# EAGLE board ControlModule-pan (EAGLE 7.2.0), part 1 of 2
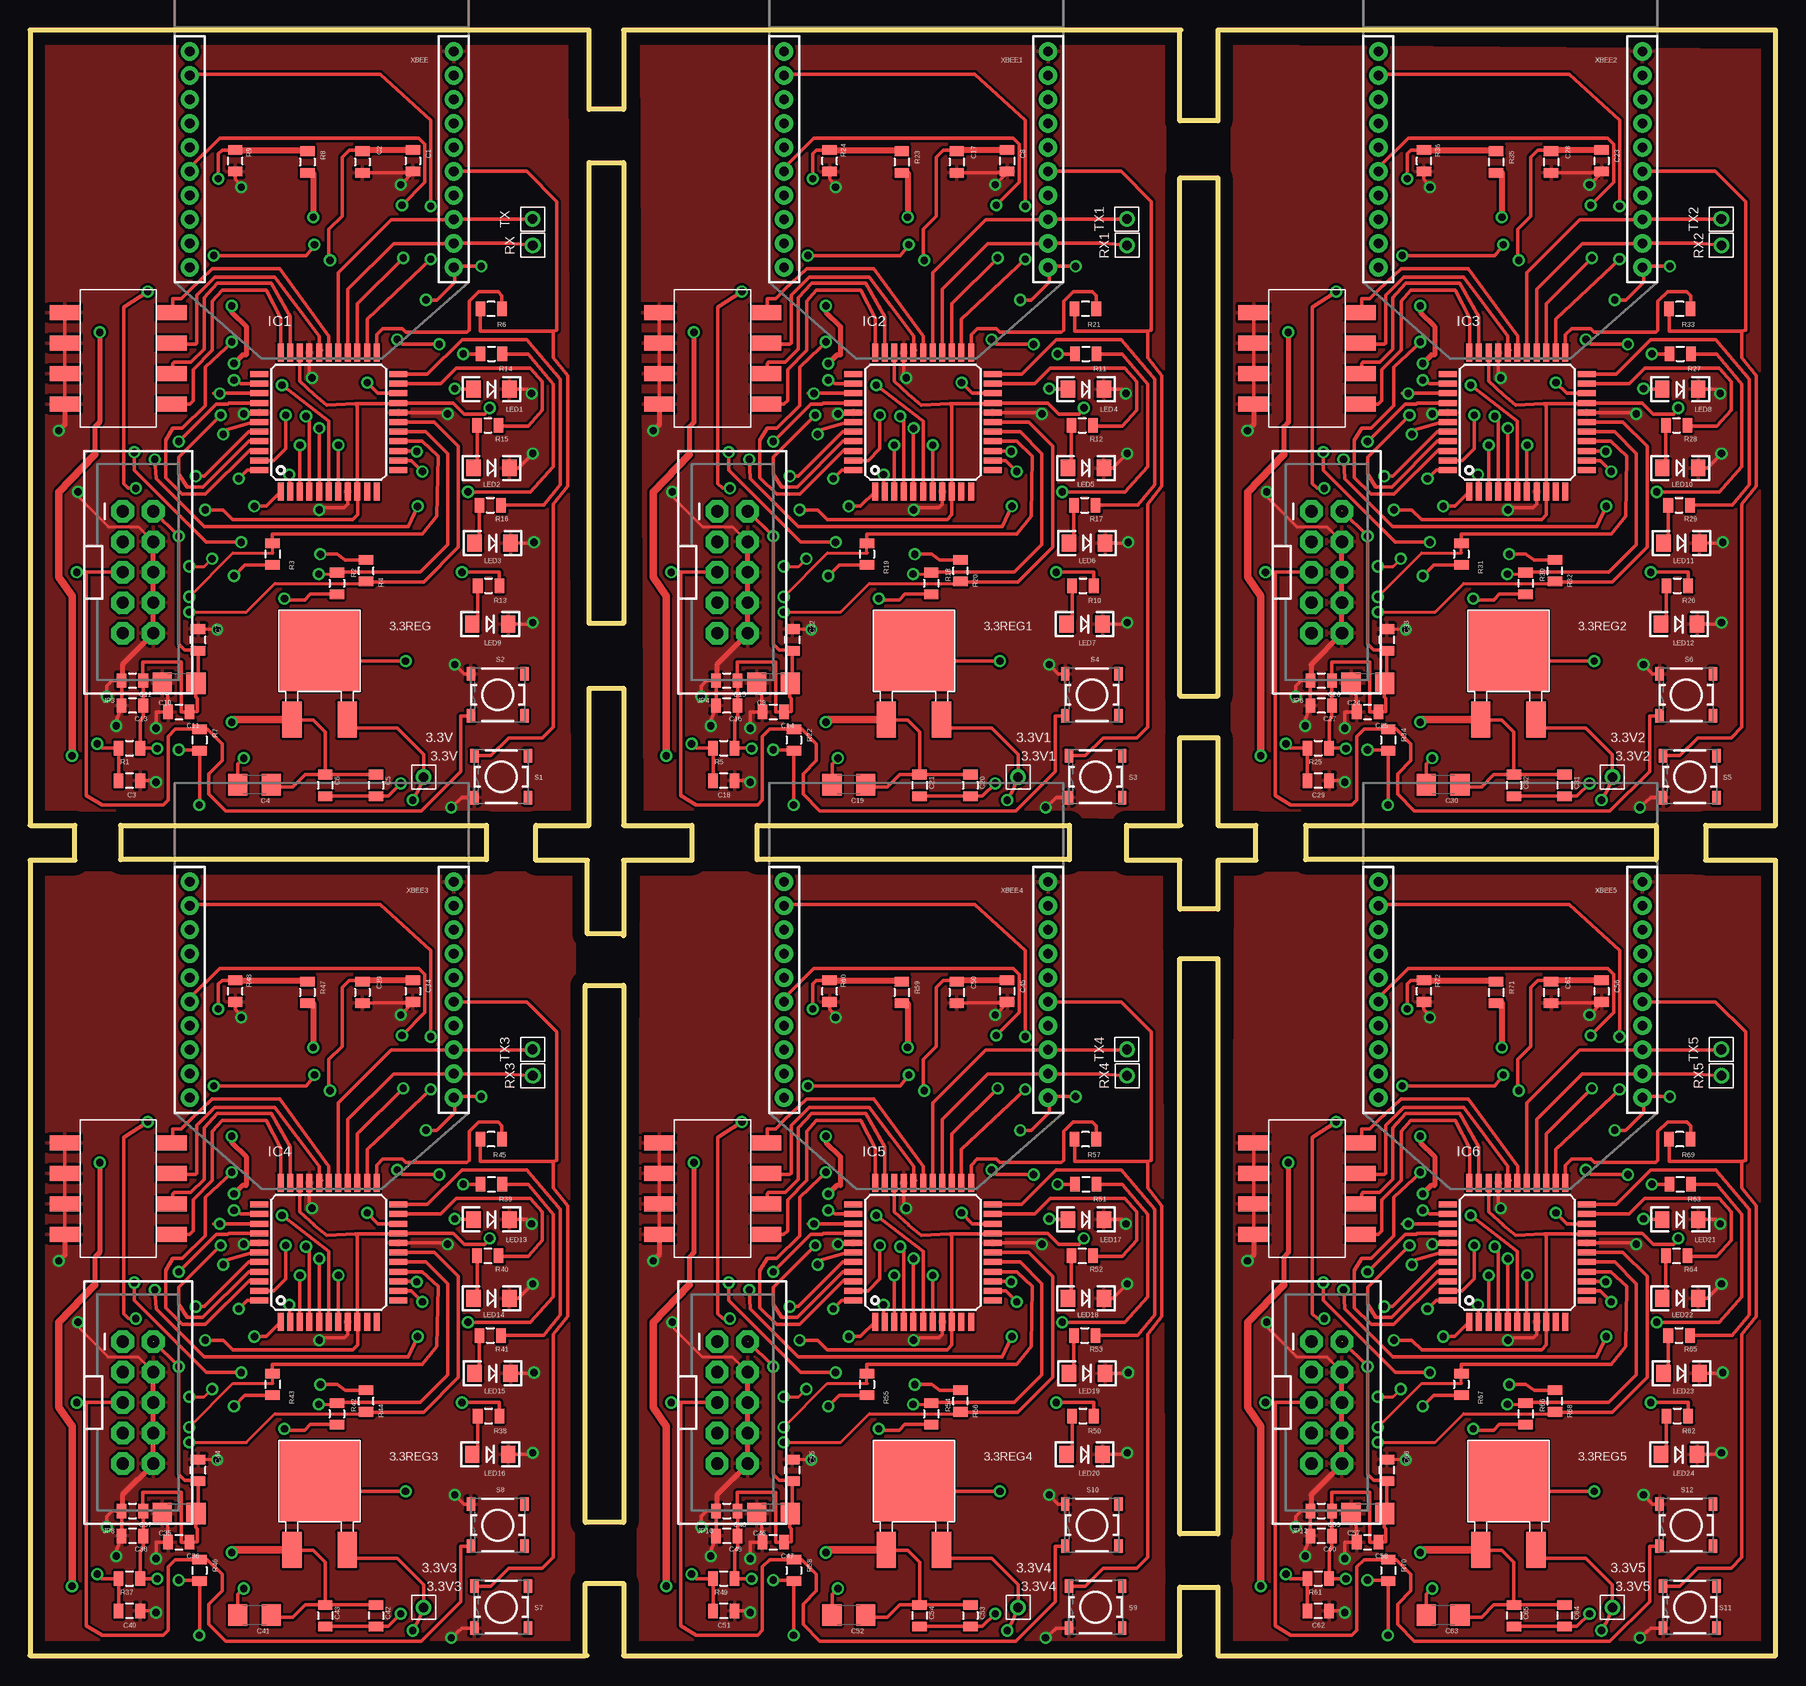
[diagram p0: board, top side]
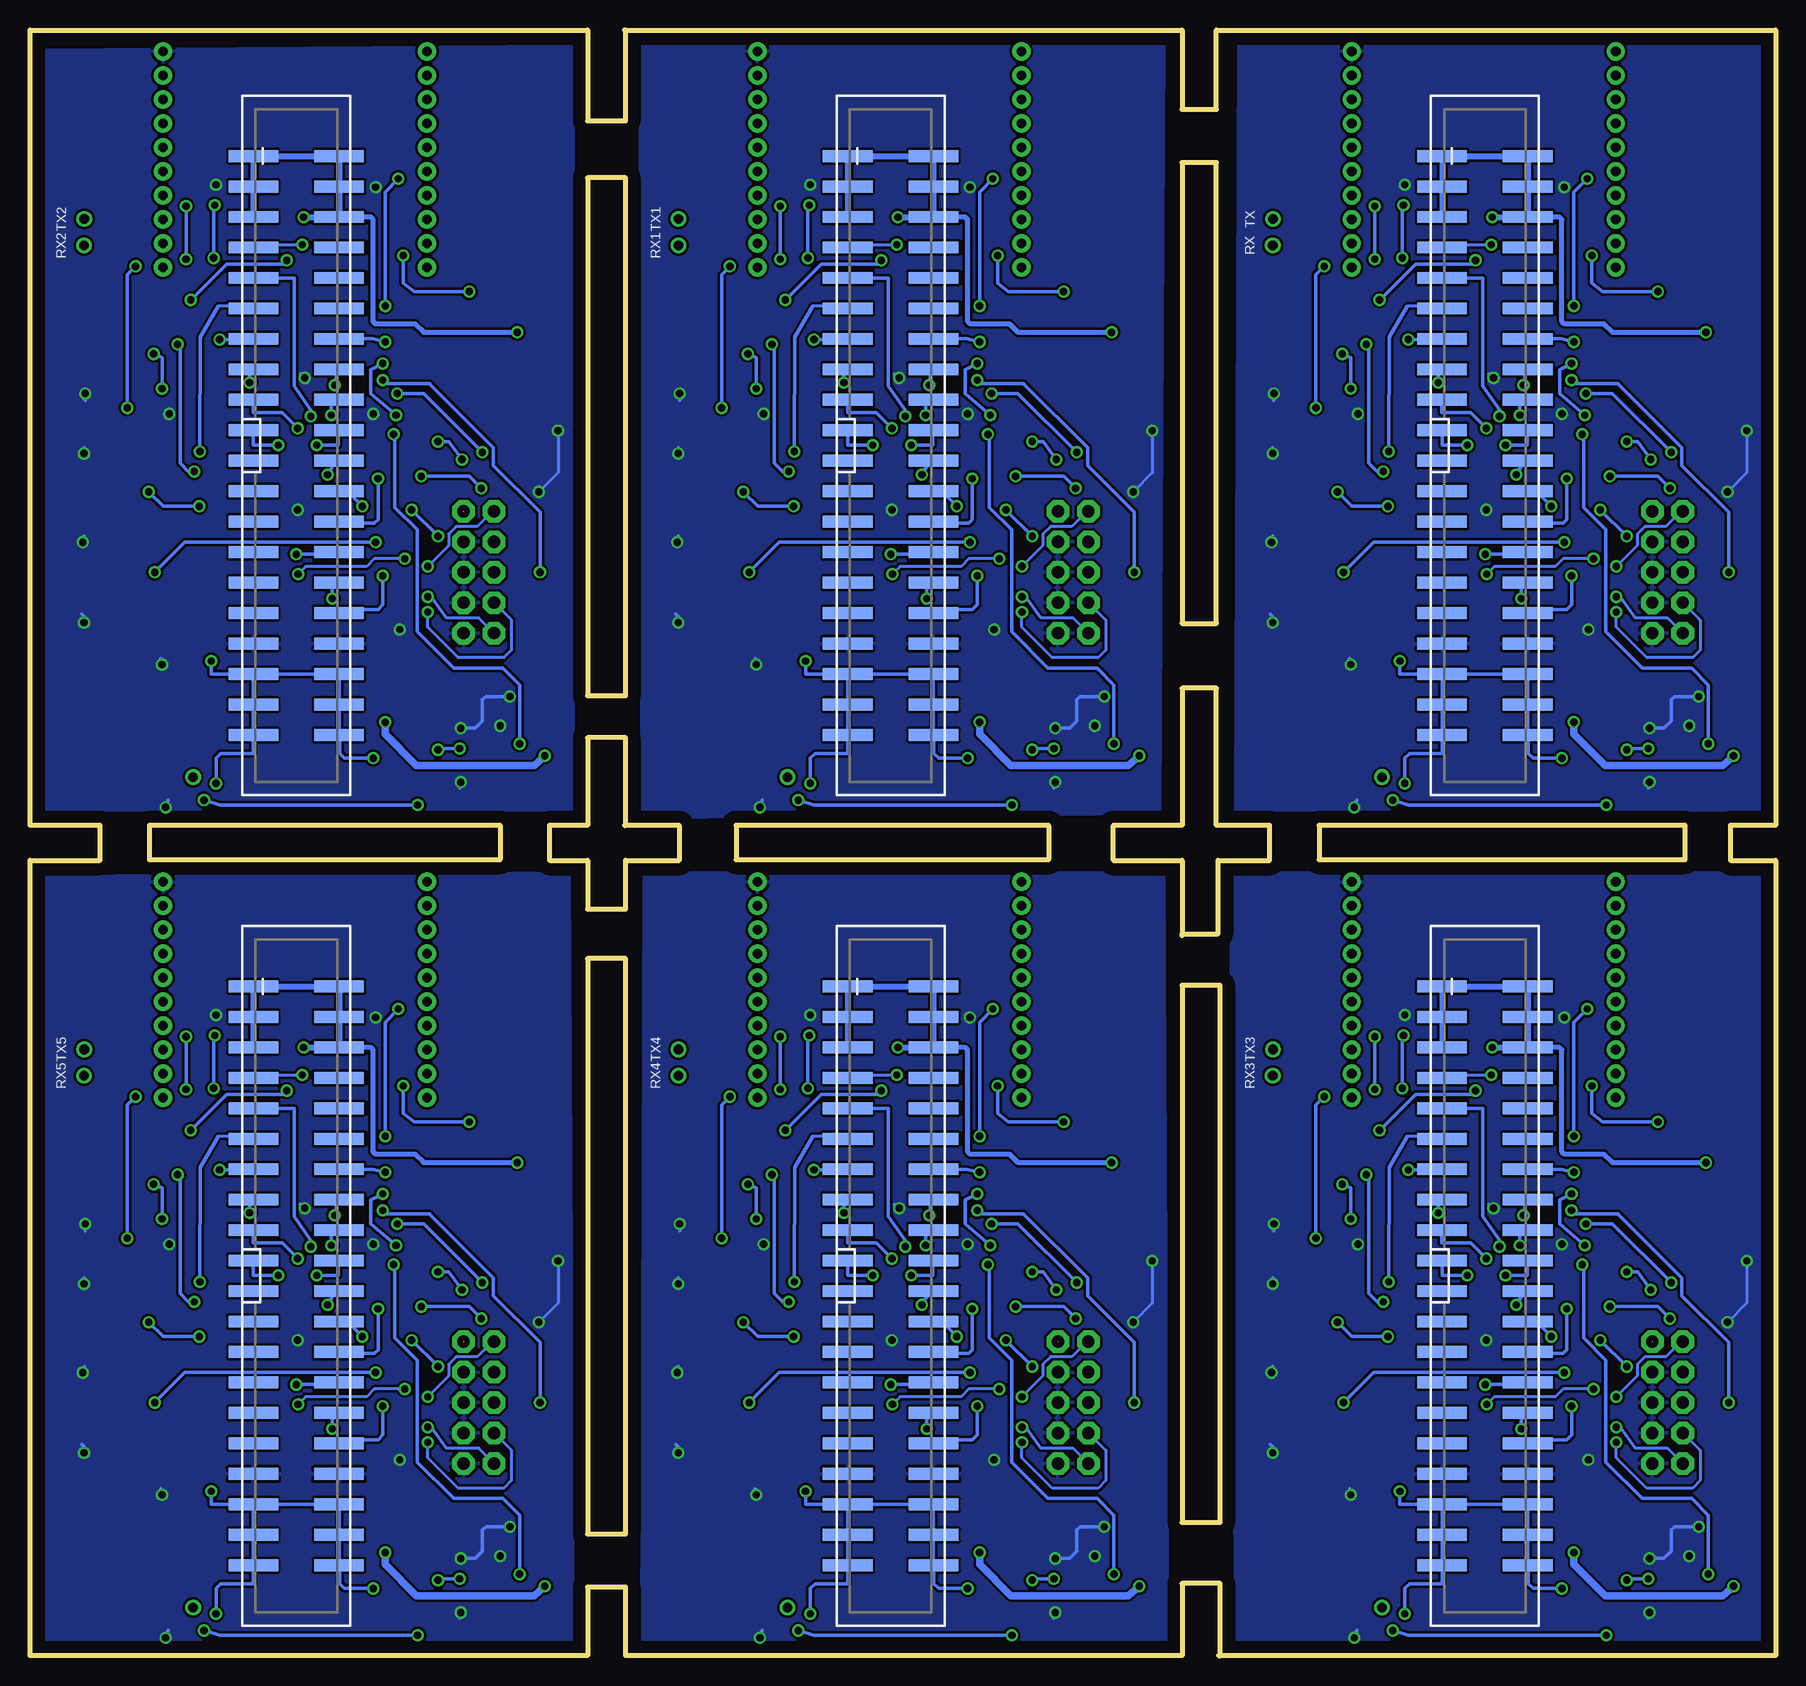
[diagram p1: board, bottom side, seen from below]

Size 145.46 x 135.51 mm. Coordinates in mm from the lower left corner, seen from the top.
Outline: 95.81,69.22 91.37,69.22 91.37,66.3 95.81,66.3 95.81,62.23 98.99,62.23 98.99,66.3 102.16,66.3 102.16,69.22 98.99,69.22 98.99,76.52 95.81,76.52 95.81,69.22
Outline: 95.93,69.22 95.81,69.22
Outline: 95.81,135.51 95.81,127.95 98.99,127.95 98.99,135.51 145.46,135.51 145.46,69.22 139.63,69.22 139.63,66.3 145.46,66.3 145.46,0 98.99,0 98.99,5.72 95.81,5.72 95.81,0 49.46,0 49.46,6.03 46.28,6.03 46.28,0
Outline: 95.81,135.51 95.93,135.51
Outline: 95.81,135.51 49.46,135.51 49.46,128.91 46.6,128.91 46.6,135.51 0,135.51 0,69.22 3.74,69.22 3.74,66.3 0,66.3 0,0 46.28,0
Outline: 46.4,0 46.28,0
Outline: 49.46,60.17 46.44,60.17 46.44,66.3 42.16,66.3 42.16,69.22 46.6,69.22 46.6,80.65 49.46,80.65 49.46,69.22 55.17,69.22 55.17,66.3 49.46,66.3 49.46,60.01
Outline: 7.55,69.22 38.03,69.22 38.03,66.36 7.55,66.36 7.55,69.22
Outline: 46.6,86.04 46.6,124.46 49.46,124.46 49.46,86.04 46.6,86.04
Outline: 60.57,69.22 86.61,69.22 86.61,66.36 60.57,66.36 60.57,69.22
Outline: 95.81,80.01 95.81,123.19 98.99,123.19 98.99,80.01 95.81,80.01
Outline: 106.29,69.22 135.5,69.22 135.5,66.36 106.29,66.36 106.29,69.22
Outline: 46.28,11.11 46.28,55.88 49.46,55.88 49.46,11.11 46.28,11.11
Outline: 95.81,10.16 95.81,58.1 98.99,58.1 98.99,10.16 95.81,10.16
Copper layers (1*16): Top 0.035mm / dielectric 1.5mm / Bottom 0.035mm
Design rules "default": minimum track width 10mil, minimum drill 24mil, track to track 8mil, track to pad 8mil, pad to pad 8mil, via to via 8mil, smd to smd 8mil, copper to edge 40mil, drill to drill 8mil, minimum pad ring 10mil, minimum via ring 8mil, stop-mask expansion 4mil, vias tented up to drill 0mil, thermal gap 10mil

## Footprints (pad centres in the part's own frame; a part is rotated, then mirrored left to right if it is on the bottom)
DPAK = smd 6.7 x 6.7: DRAIN 0,0 | smd 3 x 1.6: GATE 5.75,-2.3; SOURCE 5.75,2.3
TESTING_PT = drill 0.8: P$1 0,0
0805 = smd 0.8 x 1.2: 1 -0.9,0; 2 0.9,0
1206 = smd 1.6 x 1.8: 1 -1.4,0; 2 1.4,0
TQFP44 = smd 1.5 x 0.5: 1 -5.8,4; 2 -5.8,3.2; 3 -5.8,2.4; 4 -5.8,1.6; 5 -5.8,0.8; 6 -5.8,0; 7 -5.8,-0.8; 8 -5.8,-1.6; 9 -5.8,-2.4; 10 -5.8,-3.2; 11 -5.8,-4; 23 5.8,-4; 24 5.8,-3.2; 25 5.8,-2.4; 26 5.8,-1.6; 27 5.8,-0.8; 28 5.8,0; 29 5.8,0.8; 30 5.8,1.6; 31 5.8,2.4; 32 5.8,3.2; 33 5.8,4 | smd 0.5 x 1.5: 12 -4,-5.8; 13 -3.2,-5.8; 14 -2.4,-5.8; 15 -1.6,-5.8; 16 -0.8,-5.8; 17 0,-5.8; 18 0.8,-5.8; 19 1.6,-5.8; 20 2.4,-5.8; 21 3.2,-5.8; 22 4,-5.8; 34 4,5.8; 35 3.2,5.8; 36 2.4,5.8; 37 1.6,5.8; 38 0.8,5.8; 39 0,5.8; 40 -0.8,5.8; 41 -1.6,5.8; 42 -2.4,5.8; 43 -3.2,5.8; 44 -4,5.8
2X20_SHROUDED_SMT = smd 4.14 x 0.991: 1 -3.569,24.13; 2 3.569,24.13; 3 -3.569,21.59; 4 3.569,21.59; 5 -3.569,19.05; 6 3.569,19.05; 7 -3.569,16.51; 8 3.569,16.51; 9 -3.569,13.97; 10 3.569,13.97; 11 -3.569,11.43; 12 3.569,11.43; 13 -3.569,8.89; 14 3.569,8.89; 15 -3.569,6.35; 16 3.569,6.35; 17 -3.569,3.81; 18 3.569,3.81; 19 -3.569,1.27; 20 3.569,1.27; 21 -3.569,-1.27; 22 3.569,-1.27; 23 -3.569,-3.81; 24 3.569,-3.81; 25 -3.569,-6.35; 26 3.569,-6.35; 27 -3.569,-8.89; 28 3.569,-8.89; 29 -3.569,-11.43; 30 3.569,-11.43; 31 -3.569,-13.97; 32 3.569,-13.97; 33 -3.569,-16.51; 34 3.569,-16.51; 35 -3.569,-19.05; 36 3.569,-19.05; 37 -3.569,-21.59; 38 3.569,-21.59; 39 -3.569,-24.13; 40 3.569,-24.13
2X5-SHROUDED = drill 1.016 pad 1.88 octagon: 1 -1.27,5.08; 2 1.27,5.08; 3 -1.27,2.54; 4 1.27,2.54; 5 -1.27,0; 6 1.27,0; 7 -1.27,-2.54; 8 1.27,-2.54; 9 -1.27,-5.08; 10 1.27,-5.08
LED-1206 = smd 1.2 x 1.4: A -1.5,0; C 1.5,0
TACTILE_SWITCH_SMD-2 = smd 0.7 x 1.1: 1 2.225,1.75; 2 2.225,-1.75; 3 -2.225,-1.75; 4 -2.225,1.75
4-POS-DIP-SMD = smd 1.27 x 2.54: 1 -3.81,4.445; 2 -1.27,4.445; 3 1.27,4.445; 4 3.81,4.445; 5 3.81,-4.445; 6 1.27,-4.445; 7 -1.27,-4.445; 8 -3.81,-4.445
XBEE-1 = drill 0.8 pad 1.524: 1 -11,20; 2 -11,18; 3 -11,16; 4 -11,14; 5 -11,12; 6 -11,10; 7 -11,8; 8 -11,6; 9 -11,4; 10 -11,2; 11 11,2; 12 11,4; 13 11,6; 14 11,8; 15 11,10; 16 11,12; 17 11,14; 18 11,16; 19 11,18; 20 11,20

## Placement (x,y rotation side)
3.3REG  3.3REG1AREG  [DPAK]  24.13,83.78 270 top
3.3REG1  3.3REG1AREG  [DPAK]  73.66,83.78 270 top
3.3REG2  3.3REG1AREG  [DPAK]  123.19,83.78 270 top
3.3REG3  3.3REG1AREG  [DPAK]  24.13,14.57 270 top
3.3REG4  3.3REG1AREG  [DPAK]  73.66,14.57 270 top
3.3REG5  3.3REG1AREG  [DPAK]  123.19,14.57 270 top
3.3V  TEST_PT  [TESTING_PT]  32.8,73.24 0 top
3.3V1  TEST_PT  [TESTING_PT]  82.33,73.24 0 top
3.3V2  TEST_PT  [TESTING_PT]  131.86,73.24 0 top
3.3V3  TEST_PT  [TESTING_PT]  32.8,4.02 0 top
3.3V4  TEST_PT  [TESTING_PT]  82.33,4.02 0 top
3.3V5  TEST_PT  [TESTING_PT]  131.86,4.02 0 top
C1  1uF  [0805]  31.9,124.61 270 top
C2  0.01uF  [0805]  27.7,124.51 270 top
C3  0.1uF  [0805]  8.29,72.95 180 top
C4  47uF  [1206]  18.7,72.6 180 top
C5  1uF  [0805]  28.83,72.55 270 top
C6  .01uF  [0805]  24.61,72.55 270 top
C7  .01uF  [0805]  14.01,84.68 90 top
C8  1uF  [0805]  81.43,124.61 270 top
C9  47uF  [1206]  61.96,81.06 180 top
C10  47uF  [1206]  12.43,81.06 180 top
C11  .01uF  [0805]  12.41,78.68 0 top
C12  1uF  [0805]  8.54,81.28 0 top
C13  1uF  [0805]  8.54,79.2 180 top
C14  .01uF  [0805]  61.94,78.68 0 top
C15  1uF  [0805]  58.07,81.28 0 top
C16  1uF  [0805]  58.07,79.2 180 top
C17  0.01uF  [0805]  77.23,124.51 270 top
C18  0.1uF  [0805]  57.82,72.95 180 top
C19  47uF  [1206]  68.23,72.6 180 top
C20  1uF  [0805]  78.36,72.55 270 top
C21  .01uF  [0805]  74.14,72.55 270 top
C22  .01uF  [0805]  63.54,84.68 90 top
C23  1uF  [0805]  130.96,124.61 270 top
C24  47uF  [1206]  111.49,81.06 180 top
C25  .01uF  [0805]  111.47,78.68 0 top
C26  1uF  [0805]  107.6,81.28 0 top
C27  1uF  [0805]  107.6,79.2 180 top
C28  0.01uF  [0805]  126.76,124.51 270 top
C29  0.1uF  [0805]  107.35,72.95 180 top
C30  47uF  [1206]  117.76,72.6 180 top
C31  1uF  [0805]  127.89,72.55 270 top
C32  .01uF  [0805]  123.67,72.55 270 top
C33  .01uF  [0805]  113.07,84.68 90 top
C34  1uF  [0805]  31.9,55.39 270 top
C35  47uF  [1206]  12.43,11.85 180 top
C36  .01uF  [0805]  12.41,9.46 0 top
C37  1uF  [0805]  8.54,12.07 0 top
C38  1uF  [0805]  8.54,9.98 180 top
C39  0.01uF  [0805]  27.7,55.29 270 top
C40  0.1uF  [0805]  8.29,3.73 180 top
C41  47uF  [1206]  18.7,3.38 180 top
C42  1uF  [0805]  28.83,3.34 270 top
C43  .01uF  [0805]  24.61,3.34 270 top
C44  .01uF  [0805]  14.01,15.46 90 top
C45  1uF  [0805]  81.43,55.39 270 top
C46  47uF  [1206]  61.96,11.85 180 top
C47  .01uF  [0805]  61.94,9.46 0 top
C48  1uF  [0805]  58.07,12.07 0 top
C49  1uF  [0805]  58.07,9.98 180 top
C50  0.01uF  [0805]  77.23,55.29 270 top
C51  0.1uF  [0805]  57.82,3.73 180 top
C52  47uF  [1206]  68.23,3.38 180 top
C53  1uF  [0805]  78.36,3.34 270 top
C54  .01uF  [0805]  74.14,3.34 270 top
C55  .01uF  [0805]  63.54,15.46 90 top
C56  1uF  [0805]  130.96,55.39 270 top
C57  47uF  [1206]  111.49,11.85 180 top
C58  .01uF  [0805]  111.47,9.46 0 top
C59  1uF  [0805]  107.6,12.07 0 top
C60  1uF  [0805]  107.6,9.98 180 top
C61  0.01uF  [0805]  126.76,55.29 270 top
C62  0.1uF  [0805]  107.35,3.73 180 top
C63  47uF  [1206]  117.76,3.38 180 top
C64  1uF  [0805]  127.89,3.34 270 top
C65  .01uF  [0805]  123.67,3.34 270 top
C66  .01uF  [0805]  113.07,15.46 90 top
FRAME1  FRAME-LETTER  [CREATIVE_COMMONS]  -102.94,150.5 0 top  (outside the outline)
IC1  XMEGA16A4A  [TQFP44]  24.89,102.83 90 top
IC2  XMEGA16A4A  [TQFP44]  74.42,102.83 90 top
IC3  XMEGA16A4A  [TQFP44]  123.95,102.83 90 top
IC4  XMEGA16A4A  [TQFP44]  24.89,33.61 90 top
IC5  XMEGA16A4A  [TQFP44]  74.42,33.61 90 top
IC6  XMEGA16A4A  [TQFP44]  123.95,33.61 90 top
JP1  M20X2SHROUDED_SMT  [2X20_SHROUDED_SMT]  24.21,100.88 0 bottom
JP2  M20X2SHROUDED_SMT  [2X20_SHROUDED_SMT]  73.74,100.88 0 bottom
JP3  [2X5-SHROUDED]  9,90.31 0 top
JP4  [2X5-SHROUDED]  58.53,90.31 0 top
JP5  M20X2SHROUDED_SMT  [2X20_SHROUDED_SMT]  123.27,100.88 0 bottom
JP6  [2X5-SHROUDED]  108.06,90.31 0 top
JP7  M20X2SHROUDED_SMT  [2X20_SHROUDED_SMT]  24.21,31.66 0 bottom
JP8  [2X5-SHROUDED]  9,21.1 0 top
JP9  M20X2SHROUDED_SMT  [2X20_SHROUDED_SMT]  73.74,31.66 0 bottom
JP10  [2X5-SHROUDED]  58.53,21.1 0 top
JP11  M20X2SHROUDED_SMT  [2X20_SHROUDED_SMT]  123.27,31.66 0 bottom
JP12  [2X5-SHROUDED]  108.06,21.1 0 top
LED1  [LED-1206]  38.46,105.56 0 top
LED2  [LED-1206]  38.46,99.01 0 top
LED3  [LED-1206]  38.56,92.75 0 top
LED4  [LED-1206]  87.99,105.56 0 top
LED5  [LED-1206]  87.99,99.01 0 top
LED6  [LED-1206]  88.09,92.75 0 top
LED7  [LED-1206]  87.89,85.99 0 top
LED8  [LED-1206]  137.52,105.56 0 top
LED9  [LED-1206]  38.36,85.99 0 top
LED10  [LED-1206]  137.52,99.01 0 top
LED11  [LED-1206]  137.62,92.75 0 top
LED12  [LED-1206]  137.42,85.99 0 top
LED13  [LED-1206]  38.46,36.35 0 top
LED14  [LED-1206]  38.46,29.79 0 top
LED15  [LED-1206]  38.56,23.53 0 top
LED16  [LED-1206]  38.36,16.78 0 top
LED17  [LED-1206]  87.99,36.35 0 top
LED18  [LED-1206]  87.99,29.79 0 top
LED19  [LED-1206]  88.09,23.53 0 top
LED20  [LED-1206]  87.89,16.78 0 top
LED21  [LED-1206]  137.52,36.35 0 top
LED22  [LED-1206]  137.52,29.79 0 top
LED23  [LED-1206]  137.62,23.53 0 top
LED24  [LED-1206]  137.42,16.78 0 top
R1  10k  [0805]  8.29,75.65 0 top
R2  4.7k  [0805]  25.57,89.38 270 top
R3  4.7k  [0805]  20.22,91.83 270 top
R4  4.7k  [0805]  28.01,90.44 90 top
R5  10k  [0805]  57.82,75.65 0 top
R6  4.7k  [0805]  38.43,112.26 180 top
R7  10k  [0805]  14.13,76.33 270 top
R8  80k  [0805]  23.11,124.51 270 top
R9  20k  [0805]  17.11,124.61 90 top
R10  1k  [0805]  87.74,89.2 0 top
R11  1k  [0805]  87.99,108.52 0 top
R12  1k  [0805]  87.69,102.56 0 top
R13  1k  [0805]  38.21,89.2 0 top
R14  1k  [0805]  38.46,108.52 0 top
R15  1k  [0805]  38.16,102.56 0 top
R16  1k  [0805]  38.36,95.9 0 top
R17  1k  [0805]  87.89,95.9 0 top
R18  4.7k  [0805]  75.1,89.38 270 top
R19  4.7k  [0805]  69.75,91.83 270 top
R20  4.7k  [0805]  77.54,90.44 90 top
R21  4.7k  [0805]  87.96,112.26 180 top
R22  10k  [0805]  63.66,76.33 270 top
R23  80k  [0805]  72.64,124.51 270 top
R24  20k  [0805]  66.64,124.61 90 top
R25  10k  [0805]  107.35,75.65 0 top
R26  1k  [0805]  137.27,89.2 0 top
R27  1k  [0805]  137.52,108.52 0 top
R28  1k  [0805]  137.22,102.56 0 top
R29  1k  [0805]  137.42,95.9 0 top
R30  4.7k  [0805]  124.63,89.38 270 top
R31  4.7k  [0805]  119.28,91.83 270 top
R32  4.7k  [0805]  127.07,90.44 90 top
R33  4.7k  [0805]  137.49,112.26 180 top
R34  10k  [0805]  113.19,76.33 270 top
R35  80k  [0805]  122.17,124.51 270 top
R36  20k  [0805]  116.17,124.61 90 top
R37  10k  [0805]  8.29,6.43 0 top
R38  1k  [0805]  38.21,19.98 0 top
R39  1k  [0805]  38.46,39.3 0 top
R40  1k  [0805]  38.16,33.34 0 top
R41  1k  [0805]  38.36,26.69 0 top
R42  4.7k  [0805]  25.57,20.17 270 top
R43  4.7k  [0805]  20.22,22.61 270 top
R44  4.7k  [0805]  28.01,21.23 90 top
R45  4.7k  [0805]  38.43,43.05 180 top
R46  10k  [0805]  14.13,7.11 270 top
R47  80k  [0805]  23.11,55.29 270 top
R48  20k  [0805]  17.11,55.39 90 top
R49  10k  [0805]  57.82,6.43 0 top
R50  1k  [0805]  87.74,19.98 0 top
R51  1k  [0805]  87.99,39.3 0 top
R52  1k  [0805]  87.69,33.34 0 top
R53  1k  [0805]  87.89,26.69 0 top
R54  4.7k  [0805]  75.1,20.17 270 top
R55  4.7k  [0805]  69.75,22.61 270 top
R56  4.7k  [0805]  77.54,21.23 90 top
R57  4.7k  [0805]  87.96,43.05 180 top
R58  10k  [0805]  63.66,7.11 270 top
R59  80k  [0805]  72.64,55.29 270 top
R60  20k  [0805]  66.64,55.39 90 top
R61  10k  [0805]  107.35,6.43 0 top
R62  1k  [0805]  137.27,19.98 0 top
R63  1k  [0805]  137.52,39.3 0 top
R64  1k  [0805]  137.22,33.34 0 top
R65  1k  [0805]  137.42,26.69 0 top
R66  4.7k  [0805]  124.63,20.17 270 top
R67  4.7k  [0805]  119.28,22.61 270 top
R68  4.7k  [0805]  127.07,21.23 90 top
R69  4.7k  [0805]  137.49,43.05 180 top
R70  10k  [0805]  113.19,7.11 270 top
R71  80k  [0805]  122.17,55.29 270 top
R72  20k  [0805]  116.17,55.39 90 top
RX  TEST_PT  [TESTING_PT]  41.9,117.56 90 top
RX1  TEST_PT  [TESTING_PT]  91.43,117.56 90 top
RX2  TEST_PT  [TESTING_PT]  140.96,117.56 90 top
RX3  TEST_PT  [TESTING_PT]  41.9,48.34 90 top
RX4  TEST_PT  [TESTING_PT]  91.43,48.34 90 top
RX5  TEST_PT  [TESTING_PT]  140.96,48.34 90 top
S1  SWITCH-MOMENTARY-2SMD-2  [TACTILE_SWITCH_SMD-2]  39.26,73.27 180 top
S2  SWITCH-MOMENTARY-2SMD-2  [TACTILE_SWITCH_SMD-2]  38.97,80.1 180 top
S3  SWITCH-MOMENTARY-2SMD-2  [TACTILE_SWITCH_SMD-2]  88.79,73.27 180 top
S4  SWITCH-MOMENTARY-2SMD-2  [TACTILE_SWITCH_SMD-2]  88.5,80.1 180 top
S5  SWITCH-MOMENTARY-2SMD-2  [TACTILE_SWITCH_SMD-2]  138.32,73.27 180 top
S6  SWITCH-MOMENTARY-2SMD-2  [TACTILE_SWITCH_SMD-2]  138.03,80.1 180 top
S7  SWITCH-MOMENTARY-2SMD-2  [TACTILE_SWITCH_SMD-2]  39.26,4.05 180 top
S8  SWITCH-MOMENTARY-2SMD-2  [TACTILE_SWITCH_SMD-2]  38.97,10.88 180 top
S9  SWITCH-MOMENTARY-2SMD-2  [TACTILE_SWITCH_SMD-2]  88.79,4.05 180 top
S10  SWITCH-MOMENTARY-2SMD-2  [TACTILE_SWITCH_SMD-2]  88.5,10.88 180 top
S11  SWITCH-MOMENTARY-2SMD-2  [TACTILE_SWITCH_SMD-2]  138.32,4.05 180 top
S12  SWITCH-MOMENTARY-2SMD-2  [TACTILE_SWITCH_SMD-2]  138.03,10.88 180 top
TX  TEST_PT  [TESTING_PT]  41.88,119.75 90 top
TX1  TEST_PT  [TESTING_PT]  91.41,119.75 90 top
TX2  TEST_PT  [TESTING_PT]  140.94,119.75 90 top
TX3  TEST_PT  [TESTING_PT]  41.88,50.54 90 top
TX4  TEST_PT  [TESTING_PT]  91.41,50.54 90 top
TX5  TEST_PT  [TESTING_PT]  140.94,50.54 90 top
U$1  4-POS-DIP  [4-POS-DIP-SMD]  7.35,108.15 270 top
U$2  4-POS-DIP  [4-POS-DIP-SMD]  56.88,108.15 270 top
U$3  4-POS-DIP  [4-POS-DIP-SMD]  106.41,108.15 270 top
U$4  4-POS-DIP  [4-POS-DIP-SMD]  7.35,38.93 270 top
U$5  4-POS-DIP  [4-POS-DIP-SMD]  56.88,38.93 270 top
U$6  4-POS-DIP  [4-POS-DIP-SMD]  106.41,38.93 270 top
XBEE  XBEE-1B1  [XBEE-1]  24.31,135.73 180 top
XBEE1  XBEE-1B1  [XBEE-1]  73.84,135.73 180 top
XBEE2  XBEE-1B1  [XBEE-1]  123.37,135.73 180 top
XBEE3  XBEE-1B1  [XBEE-1]  24.31,66.51 180 top
XBEE4  XBEE-1B1  [XBEE-1]  73.84,66.51 180 top
XBEE5  XBEE-1B1  [XBEE-1]  123.37,66.51 180 top

## Library data of the parts
3.3REG 3.3REG1-3.3REG5 3.3V 3.3V1-3.3V5 RX RX1-RX5 TX TX1-TX5 = gen3
C1-C66 = SparkFun-Capacitors
FRAME1 = SparkFun-Aesthetics
IC1-IC6 = atmel; OC_FARNELL: unknown; OC_NEWARK: unknown
JP1-JP12 = SparkFun-Connectors
LED1-LED24 = SparkFun-LED
R1 R5-R17 R21-R29 R33-R41 R45-R53 R57-R65 R69-R72 = SparkFun-Passives
R2-R4 R18-R20 R30-R32 R42-R44 R54-R56 R66-R68 = SparkFun-Resistors
S1-S12 = SparkFun-Electromechanical
U$1-U$6 = SparkFun-Electromechanical; PROD_ID: SWCH-12418
XBEE XBEE1-XBEE5 = SparkFun-RF

## Nets
3.3V: 3.3REG.SOURCE 3.3V.P$1 C1.1 C2.1 C7.1 C10.1 C11.2 C12.2 C13.1 IC1.9 IC1.19 IC1.31 JP3.2 R1.2 R7.2 XBEE.1
3.3V1: 3.3REG1.SOURCE 3.3V1.P$1 C8.1 C9.1 C14.2 C15.2 C16.1 C17.1 C22.1 IC2.9 IC2.19 IC2.31 JP4.2 R5.2 R22.2 XBEE1.1
3.3V2: 3.3REG2.SOURCE 3.3V2.P$1 C23.1 C24.1 C25.2 C26.2 C27.1 C28.1 C33.1 IC3.9 IC3.19 IC3.31 JP6.2 R25.2 R34.2 XBEE2.1
3.3V3: 3.3REG3.SOURCE 3.3V3.P$1 C34.1 C35.1 C36.2 C37.2 C38.1 C39.1 C44.1 IC4.9 IC4.19 IC4.31 JP8.2 R37.2 R46.2 XBEE3.1
3.3V4: 3.3REG4.SOURCE 3.3V4.P$1 C45.1 C46.1 C47.2 C48.2 C49.1 C50.1 C55.1 IC5.9 IC5.19 IC5.31 JP10.2 R49.2 R58.2 XBEE4.1
3.3V5: 3.3REG5.SOURCE 3.3V5.P$1 C56.1 C57.1 C58.2 C59.2 C60.1 C61.1 C66.1 IC6.9 IC6.19 IC6.31 JP12.2 R61.2 R70.2 XBEE5.1
12V: 3.3REG.GATE C4.1 C5.1 C6.1 JP1.1 JP1.2 JP1.3 JP1.4 JP1.5 JP1.6 R8.2
12V1: 3.3REG1.GATE C19.1 C20.1 C21.1 JP2.1 JP2.2 JP2.3 JP2.4 JP2.5 JP2.6 R23.2
12V2: 3.3REG2.GATE C30.1 C31.1 C32.1 JP5.1 JP5.2 JP5.3 JP5.4 JP5.5 JP5.6 R35.2
12V3: 3.3REG3.GATE C41.1 C42.1 C43.1 JP7.1 JP7.2 JP7.3 JP7.4 JP7.5 JP7.6 R47.2
12V4: 3.3REG4.GATE C52.1 C53.1 C54.1 JP9.1 JP9.2 JP9.3 JP9.4 JP9.5 JP9.6 R59.2
12V5: 3.3REG5.GATE C63.1 C64.1 C65.1 JP11.1 JP11.2 JP11.3 JP11.4 JP11.5 JP11.6 R71.2
12VGND: 3.3REG.DRAIN C4.2 C5.2 C6.2 JP1.35 JP1.36 JP1.37 JP1.38 JP1.39 JP1.40
12VGND1: 3.3REG1.DRAIN C19.2 C20.2 C21.2 JP2.35 JP2.36 JP2.37 JP2.38 JP2.39 JP2.40
12VGND2: 3.3REG2.DRAIN C30.2 C31.2 C32.2 JP5.35 JP5.36 JP5.37 JP5.38 JP5.39 JP5.40
12VGND3: 3.3REG3.DRAIN C41.2 C42.2 C43.2 JP7.35 JP7.36 JP7.37 JP7.38 JP7.39 JP7.40
12VGND4: 3.3REG4.DRAIN C52.2 C53.2 C54.2 JP9.35 JP9.36 JP9.37 JP9.38 JP9.39 JP9.40
12VGND5: 3.3REG5.DRAIN C63.2 C64.2 C65.2 JP11.35 JP11.36 JP11.37 JP11.38 JP11.39 JP11.40
BATSENSE: IC1.41 R8.1 R9.2
BATSENSE1: IC2.41 R23.1 R24.2
BATSENSE2: IC3.41 R35.1 R36.2
BATSENSE3: IC4.41 R47.1 R48.2
BATSENSE4: IC5.41 R59.1 R60.2
BATSENSE5: IC6.41 R71.1 R72.2
BB_IN: IC1.40 JP1.7
BB_IN1: IC2.40 JP2.7
BB_IN2: IC3.40 JP5.7
BB_IN3: IC4.40 JP7.7
BB_IN4: IC5.40 JP9.7
BB_IN5: IC6.40 JP11.7
BB_OUT: IC1.4 JP1.9
BB_OUT1: IC2.4 JP2.9
BB_OUT2: IC3.4 JP5.9
BB_OUT3: IC4.4 JP7.9
BB_OUT4: IC5.4 JP9.9
BB_OUT5: IC6.4 JP11.9
BID0: IC1.28 U$1.1
BID1: IC1.29 U$1.2
BID2: IC1.32 U$1.3
BID3: IC1.33 U$1.4
BID4: IC2.28 U$2.1
BID5: IC2.32 U$2.3
BID6: IC2.29 U$2.2
BID7: IC2.33 U$2.4
BID8: IC3.28 U$3.1
BID9: IC3.32 U$3.3
BID10: IC3.29 U$3.2
BID11: IC3.33 U$3.4
BID12: IC4.28 U$4.1
BID13: IC4.32 U$4.3
BID14: IC4.29 U$4.2
BID15: IC4.33 U$4.4
BID16: IC5.28 U$5.1
BID17: IC5.32 U$5.3
BID18: IC5.29 U$5.2
BID19: IC5.33 U$5.4
BID20: IC6.28 U$6.1
BID21: IC6.32 U$6.3
BID22: IC6.29 U$6.2
BID23: IC6.33 U$6.4
CHARGE: IC1.7 JP1.19
CHARGE1: IC2.7 JP2.19
CHARGE2: IC3.7 JP5.19
CHARGE3: IC4.7 JP7.19
CHARGE4: IC5.7 JP9.19
CHARGE5: IC6.7 JP11.19
CHARGE_DONE: IC1.5 JP1.17
CHARGE_DONE1: IC2.5 JP2.17
CHARGE_DONE2: IC3.5 JP5.17
CHARGE_DONE3: IC4.5 JP7.17
CHARGE_DONE4: IC5.5 JP9.17
CHARGE_DONE5: IC6.5 JP11.17
CHIP_ENABLE: IC1.13 JP1.13
CHIP_ENABLE1: IC2.13 JP2.13
CHIP_ENABLE2: IC3.13 JP5.13
CHIP_ENABLE3: IC4.13 JP7.13
CHIP_ENABLE4: IC5.13 JP9.13
CHIP_ENABLE5: IC6.13 JP11.13
CTS: IC1.24 XBEE.12
CTS1: IC2.24 XBEE1.12
CTS2: IC3.24 XBEE2.12
CTS3: IC4.24 XBEE3.12
CTS4: IC5.24 XBEE4.12
CTS5: IC6.24 XBEE5.12
DATA: IC1.34
DATA1: IC2.34
DATA2: IC3.34
DATA3: IC4.34
DATA4: IC5.34
DATA5: IC6.34
DISCHARGE: IC1.6 JP1.16
DISCHARGE1: IC2.6 JP2.16
DISCHARGE2: IC3.6 JP5.16
DISCHARGE3: IC4.6 JP7.16
DISCHARGE4: IC5.6 JP9.16
DISCHARGE5: IC6.6 JP11.16
DIVCAP: IC1.42 JP1.14
DIVCAP1: IC2.42 JP2.14
DIVCAP2: IC3.42 JP5.14
DIVCAP3: IC4.42 JP7.14
DIVCAP4: IC5.42 JP9.14
DIVCAP5: IC6.42 JP11.14
DRIB: IC1.43 JP1.18
DRIB1: IC2.43 JP2.18
DRIB2: IC3.43 JP5.18
DRIB3: IC4.43 JP7.18
DRIB4: IC5.43 JP9.18
DRIB5: IC6.43 JP11.18
GLED1: IC1.36 R13.2
GLED2: IC1.21 R15.2
GLED3: IC2.36 R10.2
GLED4: IC2.21 R12.2
GLED5: IC3.36 R26.2
GLED6: IC3.21 R28.2
GLED7: IC4.36 R38.2
GLED8: IC4.21 R40.2
GLED9: IC5.36 R50.2
GLED10: IC5.21 R52.2
GLED11: IC6.36 R62.2
GLED12: IC6.21 R64.2
GND: C1.2 C2.2 C3.1 C7.2 C10.2 C11.1 C12.1 C13.2 IC1.8 IC1.18 IC1.30 IC1.38 JP1.33 JP1.34 JP3.4 JP3.6 JP3.8 JP3.10 LED1.C LED2.C LED3.C LED9.C R9.1 S1.1 S2.2 U$1.5 U$1.6 U$1.7 U$1.8 XBEE.10
GND1: C8.2 C9.2 C14.1 C15.1 C16.2 C17.2 C18.1 C22.2 IC2.8 IC2.18 IC2.30 IC2.38 JP2.33 JP2.34 JP4.4 JP4.6 JP4.8 JP4.10 LED4.C LED5.C LED6.C LED7.C R24.1 S3.1 S4.2 U$2.5 U$2.6 U$2.7 U$2.8 XBEE1.10
GND2: C23.2 C24.2 C25.1 C26.1 C27.2 C28.2 C29.1 C33.2 IC3.8 IC3.18 IC3.30 IC3.38 JP5.33 JP5.34 JP6.4 JP6.6 JP6.8 JP6.10 LED8.C LED10.C LED11.C LED12.C R36.1 S5.1 S6.2 U$3.5 U$3.6 U$3.7 U$3.8 XBEE2.10
GND3: C34.2 C35.2 C36.1 C37.1 C38.2 C39.2 C40.1 C44.2 IC4.8 IC4.18 IC4.30 IC4.38 JP7.33 JP7.34 JP8.4 JP8.6 JP8.8 JP8.10 LED13.C LED14.C LED15.C LED16.C R48.1 S7.1 S8.2 U$4.5 U$4.6 U$4.7 U$4.8 XBEE3.10
GND4: C45.2 C46.2 C47.1 C48.1 C49.2 C50.2 C51.1 C55.2 IC5.8 IC5.18 IC5.30 IC5.38 JP9.33 JP9.34 JP10.4 JP10.6 JP10.8 JP10.10 LED17.C LED18.C LED19.C LED20.C R60.1 S9.1 S10.2 U$5.5 U$5.6 U$5.7 U$5.8 XBEE4.10
GND5: C56.2 C57.2 C58.1 C59.1 C60.2 C61.2 C62.1 C66.2 IC6.8 IC6.18 IC6.30 IC6.38 JP11.33 JP11.34 JP12.4 JP12.6 JP12.8 JP12.10 LED21.C LED22.C LED23.C LED24.C R72.1 S11.1 S12.2 U$6.5 U$6.6 U$6.7 U$6.8 XBEE5.10
INT: IC1.12
INT1: IC2.12
INT2: IC3.12
INT3: IC4.12
INT4: IC5.12
INT5: IC6.12
KICK_ENABLE: IC1.14 JP1.11
KICK_ENABLE1: IC2.14 JP2.11
KICK_ENABLE2: IC3.14 JP5.11
KICK_ENABLE3: IC4.14 JP7.11
KICK_ENABLE4: IC5.14 JP9.11
KICK_ENABLE5: IC6.14 JP11.11
KICK_REF: IC1.20 JP1.15
KICK_REF1: IC2.20 JP2.15
KICK_REF2: IC3.20 JP5.15
KICK_REF3: IC4.20 JP7.15
KICK_REF4: IC5.20 JP9.15
KICK_REF5: IC6.20 JP11.15
MISO: IC1.15 JP3.9 R3.1
MISO1: IC2.15 JP4.9 R19.1
MISO2: IC3.15 JP6.9 R31.1
MISO3: IC4.15 JP8.9 R43.1
MISO4: IC5.15 JP10.9 R55.1
MISO5: IC6.15 JP12.9 R67.1
MOSI: IC1.16 JP3.1 R2.1
MOSI1: IC2.16 JP4.1 R18.1
MOSI2: IC3.16 JP6.1 R30.1
MOSI3: IC4.16 JP8.1 R42.1
MOSI4: IC5.16 JP10.1 R54.1
MOSI5: IC6.16 JP12.1 R66.1
N$1: C3.2 IC1.39 R1.1
N$2: LED9.A R13.1
N$3: C18.2 IC2.39 R5.1
N$4: IC2.23 R21.1
N$5: IC1.23 R6.1
N$6: JP1.30 R2.2
N$7: JP1.32 R3.2
N$8: JP1.28 R4.2
N$9: LED1.A R14.1
N$10: LED2.A R15.1
N$11: LED3.A R16.1
N$12: JP2.30 R18.2
N$13: JP2.32 R19.2
N$14: JP2.28 R20.2
N$15: LED7.A R10.1
N$16: LED4.A R11.1
N$17: LED5.A R12.1
N$18: LED6.A R17.1
N$19: C29.2 IC3.39 R25.1
N$20: IC3.23 R33.1
N$21: JP5.30 R30.2
N$22: JP5.32 R31.2
N$23: JP5.28 R32.2
N$24: LED12.A R26.1
N$25: LED8.A R27.1
N$26: LED10.A R28.1
N$27: LED11.A R29.1
N$28: C40.2 IC4.39 R37.1
N$29: IC4.23 R45.1
N$30: JP7.30 R42.2
N$31: JP7.32 R43.2
N$32: JP7.28 R44.2
N$33: LED16.A R38.1
N$34: LED13.A R39.1
N$35: LED14.A R40.1
N$36: LED15.A R41.1
N$37: C51.2 IC5.39 R49.1
N$38: IC5.23 R57.1
N$39: JP9.30 R54.2
N$40: JP9.32 R55.2
N$41: JP9.28 R56.2
N$42: LED20.A R50.1
N$43: LED17.A R51.1
N$44: LED18.A R52.1
N$45: LED19.A R53.1
N$46: C62.2 IC6.39 R61.1
N$47: IC6.23 R69.1
N$48: JP11.30 R66.2
N$49: JP11.32 R67.2
N$50: JP11.28 R68.2
N$51: LED24.A R62.1
N$52: LED21.A R63.1
N$53: LED22.A R64.1
N$54: LED23.A R65.1
RESET: IC1.35 JP3.5 R7.1 S2.1
RESET1: IC2.35 JP4.5 R22.1 S4.1
RESET2: IC3.35 JP6.5 R34.1 S6.1
RESET3: IC4.35 JP8.5 R46.1 S8.1
RESET4: IC5.35 JP10.5 R58.1 S10.1
RESET5: IC6.35 JP12.5 R70.1 S12.1
RLED1: IC1.37 R14.2
RLED2: IC1.22 R16.2
RLED3: IC2.37 R11.2
RLED4: IC2.22 R17.2
RLED5: IC3.37 R27.2
RLED6: IC3.22 R29.2
RLED7: IC4.37 R39.2
RLED8: IC4.22 R41.2
RLED9: IC5.37 R51.2
RLED10: IC5.22 R53.2
RLED11: IC6.37 R63.2
RLED12: IC6.22 R65.2
RTS: IC1.25 XBEE.16
RTS1: IC2.25 XBEE1.16
RTS2: IC3.25 XBEE2.16
RTS3: IC4.25 XBEE3.16
RTS4: IC5.25 XBEE4.16
RTS5: IC6.25 XBEE5.16
RX: IC1.26 RX.P$1 XBEE.2
RX1: IC2.26 RX1.P$1 XBEE1.2
RX2: IC3.26 RX2.P$1 XBEE2.2
RX3: IC4.26 RX3.P$1 XBEE3.2
RX4: IC5.26 RX4.P$1 XBEE4.2
RX5: IC6.26 RX5.P$1 XBEE5.2
SCK: IC1.17 JP3.7 R4.1
SCK1: IC2.17 JP4.7 R20.1
SCK2: IC3.17 JP6.7 R32.1
SCK3: IC4.17 JP8.7 R44.1
SCK4: IC5.17 JP10.7 R56.1
SCK5: IC6.17 JP12.7 R68.1
SCL: IC1.11
SCL1: IC2.11
SCL2: IC3.11
SCL3: IC4.11
SCL4: IC5.11
SCL5: IC6.11
SDA: IC1.10
SDA1: IC2.10
SDA2: IC3.10
SDA3: IC4.10
SDA4: IC5.10
SDA5: IC6.10
SS_1: IC1.3 JP1.20
SS_2: IC1.2 JP1.22
SS_3: IC1.1 JP1.24
SS_4: IC1.44 JP1.26
SS_5: IC2.3 JP2.20
SS_6: IC2.2 JP2.22
SS_7: IC2.1 JP2.24
SS_8: IC2.44 JP2.26
SS_9: IC3.3 JP5.20
SS_10: IC3.2 JP5.22
SS_11: IC3.1 JP5.24
SS_12: IC3.44 JP5.26
SS_13: IC4.3 JP7.20
SS_14: IC4.2 JP7.22
SS_15: IC4.1 JP7.24
SS_16: IC4.44 JP7.26
SS_17: IC5.3 JP9.20
SS_18: IC5.2 JP9.22
SS_19: IC5.1 JP9.24
SS_20: IC5.44 JP9.26
SS_21: IC6.3 JP11.20
SS_22: IC6.2 JP11.22
SS_23: IC6.1 JP11.24
SS_24: IC6.44 JP11.26
TX: IC1.27 TX.P$1 XBEE.3
TX1: IC2.27 TX1.P$1 XBEE1.3
TX2: IC3.27 TX2.P$1 XBEE2.3
TX3: IC4.27 TX3.P$1 XBEE3.3
TX4: IC5.27 TX4.P$1 XBEE4.3
TX5: IC6.27 TX5.P$1 XBEE5.3
XBRST: R6.2 S1.2 XBEE.5
XBRST1: R21.2 S3.2 XBEE1.5
XBRST2: R33.2 S5.2 XBEE2.5
XBRST3: R45.2 S7.2 XBEE3.5
XBRST4: R57.2 S9.2 XBEE4.5
XBRST5: R69.2 S11.2 XBEE5.5

## Tracks (layer width: path | path; a pad name or v marks a point on that pad's centre or on a via)
3.3V  (via drill 0.6)  (1 unrouted)
  Top 0.305: IC1.31 22.49,106.23 23.7,105.12 23.7,105.11 24.74,104.27 27.1,104.37 | 27.1,104.37 30.62,104.37 IC1.19 35.29,104.43 36.2,103.52 37.9,103.52 v38.3,104.02 | 27.1,104.37 27.29,104.18 IC1.9 27.3,95.12 26.9,94.72 16.9,94.72 16.1,95.52 v14.6,95.52 | 3.3REG.SOURCE 27.15,77.31 30.6,77.31 32.8,75.11 3.3V.P$1 32.8,73.22 32.4,72.22 v31.9,71.31 | C7.1 14.01,81.28 C10.1 | C10.1 13.8,79.92 13.93,79.79 13.93,78.7 C11.2 12.6,78.68 12.6,82.81 9.4,82.81 9.4,82.31 9.41,80.75 C12.2 C13.1 9.44,78.2 9.2,77.95 9.2,75.81 9.32,75.7 9.44,75.7 R1.2 10.57,75.65 v10.6,75.62 | v12.4,75.52 13.54,75.52 R7.2 14.13,71.69 v14.1,70.92 | 10.29,95.43 v12.4,93.31 12.4,84.31 12.9,83.81 14,83.81 14,81.72 13.83,81.54 C10.1 | v37.6,115.81 35.4,115.81 XBEE.1 35.4,115.64 35.4,114.52 33.9,113.02 v33,113.02 | C1.1 26.59,125.51 26,124.92 26,120.02 24.9,118.92 24.9,116.42 v25,116.31
  Top 0.508: C1.1 27.7,125.51 C2.1
  Bottom 0.305: v10.6,75.62 12.3,75.62 v12.4,75.52 | v14.1,70.92 30.6,70.92 v31.9,71.31 | v14.6,95.52 v12.4,93.31 | v38.3,104.02 38.3,115.12 v37.6,115.81 | v25,116.31 25.3,116.02 30,116.02 v33,113.02
3.3V1  (via drill 0.6)  (1 unrouted)
  Top 0.305: IC2.31 72.02,106.23 73.23,105.12 73.23,105.11 74.27,104.27 76.63,104.37 | 76.63,104.37 80.15,104.37 IC2.19 84.82,104.43 85.73,103.52 87.43,103.52 v87.83,104.02 | 76.63,104.37 76.82,104.18 IC2.9 76.83,95.12 76.43,94.72 66.43,94.72 65.63,95.52 v64.13,95.52 | 3.3REG1.SOURCE 76.68,77.31 80.13,77.31 82.33,75.11 3.3V1.P$1 82.33,73.22 81.93,72.22 v81.43,71.31 | C22.1 63.54,81.28 C9.1 | C9.1 63.33,79.92 63.46,79.79 63.46,78.7 C14.2 62.13,78.68 62.13,82.81 58.93,82.81 58.93,82.31 58.94,80.75 C15.2 C16.1 58.97,78.2 58.73,77.95 58.73,75.81 58.85,75.7 58.97,75.7 R5.2 60.1,75.65 v60.13,75.62 | v61.93,75.52 63.07,75.52 R22.2 63.66,71.69 v63.63,70.92 | 59.82,95.43 v61.93,93.31 61.93,84.31 62.43,83.81 63.53,83.81 63.53,81.72 63.36,81.54 C9.1 | v87.13,115.81 84.93,115.81 XBEE1.1 84.93,115.64 84.93,114.52 83.43,113.02 v82.53,113.02 | C8.1 76.12,125.51 75.53,124.92 75.53,120.02 74.43,118.92 74.43,116.42 v74.53,116.31
  Top 0.508: C8.1 77.23,125.51 C17.1
  Bottom 0.305: v60.13,75.62 61.83,75.62 v61.93,75.52 | v63.63,70.92 80.13,70.92 v81.43,71.31 | v64.13,95.52 v61.93,93.31 | v87.83,104.02 87.83,115.12 v87.13,115.81 | v74.53,116.31 74.83,116.02 79.53,116.02 v82.53,113.02
3.3V2  (via drill 0.6)  (1 unrouted)
  Top 0.305: IC3.31 121.55,106.23 122.76,105.12 122.76,105.11 123.8,104.27 126.16,104.37 | 126.16,104.37 129.68,104.37 IC3.19 134.35,104.43 135.26,103.52 136.96,103.52 v137.36,104.02 | 126.16,104.37 126.35,104.18 IC3.9 126.36,95.12 125.96,94.72 115.96,94.72 115.16,95.52 v113.66,95.52 | 3.3REG2.SOURCE 126.21,77.31 129.66,77.31 131.86,75.11 3.3V2.P$1 131.86,73.22 131.46,72.22 v130.96,71.31 | C33.1 113.07,81.28 C24.1 | C24.1 112.86,79.92 112.99,79.79 112.99,78.7 C25.2 111.66,78.68 111.66,82.81 108.46,82.81 108.46,82.31 108.47,80.75 C26.2 C27.1 108.5,78.2 108.26,77.95 108.26,75.81 108.38,75.7 108.5,75.7 R25.2 109.63,75.65 v109.66,75.62 | v111.46,75.52 112.6,75.52 R34.2 113.19,71.69 v113.16,70.92 | 109.35,95.43 v111.46,93.31 111.46,84.31 111.96,83.81 113.06,83.81 113.06,81.72 112.89,81.54 C24.1 | v136.66,115.81 134.46,115.81 XBEE2.1 134.46,115.64 134.46,114.52 132.96,113.02 v132.06,113.02 | C23.1 125.65,125.51 125.06,124.92 125.06,120.02 123.96,118.92 123.96,116.42 v124.06,116.31
  Top 0.508: C23.1 126.76,125.51 C28.1
  Bottom 0.305: v109.66,75.62 111.36,75.62 v111.46,75.52 | v113.16,70.92 129.66,70.92 v130.96,71.31 | v113.66,95.52 v111.46,93.31 | v137.36,104.02 137.36,115.12 v136.66,115.81 | v124.06,116.31 124.36,116.02 129.06,116.02 v132.06,113.02
3.3V3  (via drill 0.6)  (1 unrouted)
  Top 0.305: IC4.31 22.49,37.01 23.7,35.9 23.7,35.89 24.74,35.05 27.1,35.15 | 27.1,35.15 30.62,35.15 IC4.19 35.29,35.21 36.2,34.3 37.9,34.3 v38.3,34.8 | 27.1,35.15 27.29,34.96 IC4.9 27.3,27.8 27.3,25.9 26.9,25.5 16.9,25.5 16.1,26.3 v14.6,26.3 | 3.3REG3.SOURCE 27.15,8.1 30.6,8.1 32.8,5.9 3.3V3.P$1 32.8,4 32.4,3 v31.9,2.1 | C44.1 14.01,12.06 C35.1 | C35.1 13.8,10.7 13.93,10.57 13.93,9.48 C36.2 12.6,9.46 12.6,13.6 9.4,13.6 9.4,13.1 9.41,11.54 C37.2 C38.1 9.44,8.98 9.2,8.74 9.2,6.6 9.32,6.48 9.44,6.48 R37.2 10.57,6.43 v10.6,6.4 | v12.4,6.3 13.54,6.3 R46.2 14.13,2.47 v14.1,1.7 | 10.29,26.21 v12.4,24.1 12.4,15.1 12.9,14.6 14,14.6 14,12.5 13.83,12.33 C35.1 | v37.6,46.6 35.4,46.6 XBEE3.1 35.4,46.43 35.4,45.3 33.9,43.8 v33,43.8 | C34.1 26.59,56.29 26,55.7 26,50.8 24.9,49.7 24.9,47.2 v25,47.1
  Top 0.508: C34.1 27.7,56.29 C39.1
  Bottom 0.305: v10.6,6.4 12.3,6.4 v12.4,6.3 | v14.1,1.7 30.6,1.7 v31.9,2.1 | v14.6,26.3 v12.4,24.1 | v38.3,34.8 38.3,45.9 v37.6,46.6 | v25,47.1 25.3,46.8 30,46.8 v33,43.8
3.3V4  (via drill 0.6)  (1 unrouted)
  Top 0.305: IC5.31 72.02,37.01 73.23,35.9 73.23,35.89 74.27,35.05 76.63,35.15 | 76.63,35.15 80.15,35.15 IC5.19 84.82,35.21 85.73,34.3 87.43,34.3 v87.83,34.8 | 76.63,35.15 76.82,34.96 IC5.9 76.83,27.8 76.83,25.9 76.43,25.5 66.43,25.5 65.63,26.3 v64.13,26.3 | 3.3REG4.SOURCE 76.68,8.1 80.13,8.1 82.33,5.9 3.3V4.P$1 82.33,4 81.93,3 v81.43,2.1 | C55.1 63.54,12.06 C46.1 | C46.1 63.33,10.7 63.46,10.57 63.46,9.48 C47.2 62.13,9.46 62.13,13.6 58.93,13.6 58.93,13.1 58.94,11.54 C48.2 C49.1 58.97,8.98 58.73,8.74 58.73,6.6 58.85,6.48 58.97,6.48 R49.2 60.1,6.43 v60.13,6.4 | v61.93,6.3 63.07,6.3 R58.2 63.66,2.47 v63.63,1.7 | 59.82,26.21 v61.93,24.1 61.93,15.1 62.43,14.6 63.53,14.6 63.53,12.5 63.36,12.33 C46.1 | v87.13,46.6 84.93,46.6 XBEE4.1 84.93,46.43 84.93,45.3 83.43,43.8 v82.53,43.8 | C45.1 76.12,56.29 75.53,55.7 75.53,50.8 74.43,49.7 74.43,47.2 v74.53,47.1
  Top 0.508: C45.1 77.23,56.29 C50.1
  Bottom 0.305: v60.13,6.4 61.83,6.4 v61.93,6.3 | v63.63,1.7 80.13,1.7 v81.43,2.1 | v64.13,26.3 v61.93,24.1 | v87.83,34.8 87.83,45.9 v87.13,46.6 | v74.53,47.1 74.83,46.8 79.53,46.8 v82.53,43.8
3.3V5  (via drill 0.6)  (1 unrouted)
  Top 0.305: IC6.31 121.55,37.01 122.76,35.9 122.76,35.89 123.8,35.05 126.16,35.15 | 126.16,35.15 129.68,35.15 IC6.19 134.35,35.21 135.26,34.3 136.96,34.3 v137.36,34.8 | 126.16,35.15 126.35,34.96 IC6.9 126.36,27.8 126.36,25.9 125.96,25.5 115.96,25.5 115.16,26.3 v113.66,26.3 | 3.3REG5.SOURCE 126.21,8.1 129.66,8.1 131.86,5.9 3.3V5.P$1 131.86,4 131.46,3 v130.96,2.1 | C66.1 113.07,12.06 C57.1 | C57.1 112.86,10.7 112.99,10.57 112.99,9.48 C58.2 111.66,9.46 111.66,13.6 108.46,13.6 108.46,13.1 108.47,11.54 C59.2 C60.1 108.5,8.98 108.26,8.74 108.26,6.6 108.38,6.48 108.5,6.48 R61.2 109.63,6.43 v109.66,6.4 | v111.46,6.3 112.6,6.3 R70.2 113.19,2.47 v113.16,1.7 | 109.35,26.21 v111.46,24.1 111.46,15.1 111.96,14.6 113.06,14.6 113.06,12.5 112.89,12.33 C57.1 | v136.66,46.6 134.46,46.6 XBEE5.1 134.46,46.43 134.46,45.3 132.96,43.8 v132.06,43.8 | C56.1 125.65,56.29 125.06,55.7 125.06,50.8 123.96,49.7 123.96,47.2 v124.06,47.1
  Top 0.508: C56.1 126.76,56.29 C61.1
  Bottom 0.305: v109.66,6.4 111.36,6.4 v111.46,6.3 | v113.16,1.7 129.66,1.7 v130.96,2.1 | v113.66,26.3 v111.46,24.1 | v137.36,34.8 137.36,45.9 v136.66,46.6 | v124.06,47.1 124.36,46.8 129.06,46.8 v132.06,43.8
12V  (via drill 0.6)
  Top 0.305: C6.1 24.61,77.01 23.6,78.02 21.83,78.02 3.3REG.GATE | C6.1 C5.1 | C6.1 22.94,73.45 21.9,72.42 20.29,72.42 C4.1
  Top 0.406: v5.8,110.31 5.8,102.81 5.4,102.42 5.4,100.12
  Top 0.508: R8.2 23.6,123.61 v23.6,119.92
  Top 0.61: 3.3REG.GATE 17.02,78.03 v16.8,77.81 | v3.5,75.02 3.5,88.31 2.4,89.92 2.4,97.02 5.4,100.12
  Bottom 0.406: 20.63,119.92 18,119.92 17.8,119.72 17.8,111.22 17.6,111.02 14.3,111.02 13.6,110.31 v5.8,110.31
  Bottom 0.508: JP1.5 JP1.3 JP1.1 JP1.2 JP1.4 JP1.6 v23.6,119.92
  Bottom 0.61: v16.8,77.81 16.8,76.81 14.2,74.22 4.4,74.22 v3.5,75.02 | 20.63,119.92 JP1.6
12V1  (via drill 0.6)
  Top 0.305: C21.1 74.14,77.01 73.13,78.02 71.36,78.02 3.3REG1.GATE | C21.1 C20.1 | C21.1 72.47,73.45 71.43,72.42 69.82,72.42 C19.1
  Top 0.406: v55.33,110.31 55.33,102.81 54.93,102.42 54.93,100.12
  Top 0.508: R23.2 73.13,123.61 v73.13,119.92
  Top 0.61: 3.3REG1.GATE 66.55,78.03 v66.33,77.81 | v53.03,75.02 53.03,88.31 51.93,89.92 51.93,97.02 54.93,100.12
  Bottom 0.406: 70.16,119.92 67.53,119.92 67.33,119.72 67.33,111.22 67.13,111.02 63.83,111.02 63.13,110.31 v55.33,110.31
  Bottom 0.508: JP2.5 JP2.3 JP2.1 JP2.2 JP2.4 JP2.6 v73.13,119.92
  Bottom 0.61: v66.33,77.81 66.33,76.81 63.73,74.22 53.93,74.22 v53.03,75.02 | 70.16,119.92 JP2.6
12V2  (via drill 0.6)
  Top 0.305: C32.1 123.67,77.01 122.66,78.02 120.89,78.02 3.3REG2.GATE | C32.1 C31.1 | C32.1 122,73.45 120.96,72.42 119.35,72.42 C30.1
  Top 0.406: v104.86,110.31 104.86,102.81 104.46,102.42 104.46,100.12
  Top 0.508: R35.2 122.66,123.61 v122.66,119.92
  Top 0.61: 3.3REG2.GATE 116.08,78.03 v115.86,77.81 | v102.56,75.02 102.56,88.31 101.46,89.92 101.46,97.02 104.46,100.12
  Bottom 0.406: 119.69,119.92 117.06,119.92 116.86,119.72 116.86,111.22 116.66,111.02 113.36,111.02 112.66,110.31 v104.86,110.31
  Bottom 0.508: JP5.5 JP5.3 JP5.1 JP5.2 JP5.4 JP5.6 v122.66,119.92
  Bottom 0.61: v115.86,77.81 115.86,76.81 113.26,74.22 103.46,74.22 v102.56,75.02 | 119.69,119.92 JP5.6
12V3  (via drill 0.6)
  Top 0.305: C43.1 24.61,7.79 23.6,8.8 21.83,8.8 3.3REG3.GATE | C43.1 C42.1 | C43.1 22.94,4.24 21.9,3.2 20.29,3.2 C41.1
  Top 0.406: v5.8,41.1 5.8,33.6 5.4,33.2 5.4,30.9
  Top 0.508: R47.2 23.6,54.39 v23.6,50.7
  Top 0.61: 3.3REG3.GATE 17.02,8.82 v16.8,8.6 | v3.5,5.8 3.5,19.1 2.4,20.7 2.4,27.8 5.4,30.9
  Bottom 0.406: 20.63,50.7 18,50.7 17.8,50.5 17.8,42 17.6,41.8 14.3,41.8 13.6,41.1 v5.8,41.1
  Bottom 0.508: JP7.5 JP7.3 JP7.1 JP7.2 JP7.4 JP7.6 20.64,50.7 v23.6,50.7
  Bottom 0.61: v16.8,8.6 16.8,7.6 14.2,5 4.4,5 v3.5,5.8 | 20.63,50.7 JP7.6
12V4  (via drill 0.6)
  Top 0.305: C54.1 74.14,7.79 73.13,8.8 71.36,8.8 3.3REG4.GATE | C54.1 C53.1 | C54.1 72.47,4.24 71.43,3.2 69.82,3.2 C52.1
  Top 0.406: v55.33,41.1 55.33,33.6 54.93,33.2 54.93,30.9
  Top 0.508: R59.2 73.13,54.39 v73.13,50.7
  Top 0.61: 3.3REG4.GATE 66.55,8.82 v66.33,8.6 | v53.03,5.8 53.03,19.1 51.93,20.7 51.93,27.8 54.93,30.9
  Bottom 0.406: 70.16,50.7 67.53,50.7 67.33,50.5 67.33,42 67.13,41.8 63.83,41.8 63.13,41.1 v55.33,41.1
  Bottom 0.508: JP9.5 JP9.3 JP9.1 JP9.2 JP9.4 JP9.6 70.17,50.7 v73.13,50.7
  Bottom 0.61: v66.33,8.6 66.33,7.6 63.73,5 53.93,5 v53.03,5.8 | 70.16,50.7 JP9.6
12V5  (via drill 0.6)
  Top 0.305: C65.1 123.67,7.79 122.66,8.8 120.89,8.8 3.3REG5.GATE | C65.1 C64.1 | C65.1 122,4.24 120.96,3.2 119.35,3.2 C63.1
  Top 0.406: v104.86,41.1 104.86,33.6 104.46,33.2 104.46,30.9
  Top 0.508: R71.2 122.66,54.39 v122.66,50.7
  Top 0.61: 3.3REG5.GATE 116.08,8.82 v115.86,8.6 | v102.56,5.8 102.56,19.1 101.46,20.7 101.46,27.8 104.46,30.9
  Bottom 0.406: 119.69,50.7 117.06,50.7 116.86,50.5 116.86,42 116.66,41.8 113.36,41.8 112.66,41.1 v104.86,41.1
  Bottom 0.508: JP11.5 JP11.3 JP11.1 JP11.2 JP11.4 JP11.6 119.7,50.7 v122.66,50.7
  Bottom 0.61: v115.86,8.6 115.86,7.6 113.26,5 103.46,5 v102.56,5.8 | 119.69,50.7 JP11.6
12VGND  (via drill 0.6)
  Top 0.305: v30.9,72.72 29.84,71.65 C5.2 C6.2 | v31.3,82.92 24.13,82.92 3.3REG.DRAIN | C4.2 17.3,74.32 v17.8,74.81
  Bottom 0.305: v30.9,72.72 30.9,74.81 30.5,75.22 27.78,75.22 JP1.39 JP1.37 JP1.35 | JP1.35 31.3,81.83 v31.3,82.92 | JP1.35 JP1.36 JP1.38 JP1.40 20.6,76.7 20.6,75.22 20.2,74.81 v17.8,74.81
12VGND1  (via drill 0.6)
  Top 0.305: v80.43,72.72 79.37,71.65 C20.2 C21.2 | v80.83,82.92 73.66,82.92 3.3REG1.DRAIN | C19.2 66.83,74.32 v67.33,74.81
  Bottom 0.305: v80.43,72.72 80.43,74.81 80.03,75.22 77.31,75.22 JP2.39 JP2.37 JP2.35 | JP2.35 80.83,81.83 v80.83,82.92 | JP2.35 JP2.36 JP2.38 JP2.40 70.13,76.7 70.13,75.22 69.73,74.81 v67.33,74.81
12VGND2  (via drill 0.6)
  Top 0.305: v129.96,72.72 128.9,71.65 C31.2 C32.2 | v130.36,82.92 123.19,82.92 3.3REG2.DRAIN | C30.2 116.36,74.32 v116.86,74.81
  Bottom 0.305: v129.96,72.72 129.96,74.81 129.56,75.22 126.84,75.22 JP5.39 JP5.37 JP5.35 | JP5.35 130.36,81.83 v130.36,82.92 | JP5.35 JP5.36 JP5.38 JP5.40 119.66,76.7 119.66,75.22 119.26,74.81 v116.86,74.81
12VGND3  (via drill 0.6)
  Top 0.305: v30.9,3.5 29.84,2.44 C42.2 C43.2 | v31.3,13.7 24.13,13.7 3.3REG3.DRAIN | C41.2 17.3,5.1 v17.8,5.6
  Bottom 0.305: v30.9,3.5 30.9,5.6 30.5,6 27.78,6 JP7.39 JP7.37 JP7.35 | JP7.35 31.3,12.61 v31.3,13.7 | JP7.35 JP7.36 JP7.38 JP7.40 20.6,7.49 20.6,6 20.2,5.6 v17.8,5.6
12VGND4  (via drill 0.6)
  Top 0.305: v80.43,3.5 79.37,2.44 C53.2 C54.2 | v80.83,13.7 73.66,13.7 3.3REG4.DRAIN | C52.2 66.83,5.1 v67.33,5.6
  Bottom 0.305: v80.43,3.5 80.43,5.6 80.03,6 77.31,6 JP9.39 JP9.37 JP9.35 | JP9.35 80.83,12.61 v80.83,13.7 | JP9.35 JP9.36 JP9.38 JP9.40 70.13,7.49 70.13,6 69.73,5.6 v67.33,5.6
12VGND5  (via drill 0.6)
  Top 0.305: v129.96,3.5 128.9,2.44 C64.2 C65.2 | v130.36,13.7 123.19,13.7 3.3REG5.DRAIN | C63.2 116.36,5.1 v116.86,5.6
  Bottom 0.305: v129.96,3.5 129.96,5.6 129.56,6 126.84,6 JP11.39 JP11.37 JP11.35 | JP11.35 130.36,12.61 v130.36,13.7 | JP11.35 JP11.36 JP11.38 JP11.40 119.66,7.49 119.66,6 119.26,5.6 v116.86,5.6
BATSENSE  (via drill 0.6)
  Top 0.305: v15.7,123.12 15.7,125.22 16,125.52 17.1,125.52 R9.2 | IC1.41 18.21,101.23 14.4,97.42 13.1,97.42 12.4,98.52 12.4,99.92 v15.9,103.42
  Top 0.406: v16.8,112.52 16.8,112.02 18,110.81 18,108.42 17.7,108.42 v17,107.72
  Top 0.508: R9.2 23.11,125.51 R8.1
  Bottom 0.305: 15.6,103.12 v15.9,103.42 18,105.22 18,107.22 v17,107.72 | v16.8,112.52 16.8,122.02 v15.7,123.12
BATSENSE1  (via drill 0.6)
  Top 0.305: v65.23,123.12 65.23,125.22 65.53,125.52 66.63,125.52 R24.2 | IC2.41 67.74,101.23 63.93,97.42 62.63,97.42 61.93,98.52 61.93,99.92 v65.43,103.42
  Top 0.406: v66.33,112.52 66.33,112.02 67.53,110.81 67.53,108.42 67.23,108.42 v66.53,107.72
  Top 0.508: R24.2 72.64,125.51 R23.1
  Bottom 0.305: 65.13,103.12 v65.43,103.42 67.53,105.22 67.53,107.22 v66.53,107.72 | v66.33,112.52 66.33,122.02 v65.23,123.12
BATSENSE2  (via drill 0.6)
  Top 0.305: v114.76,123.12 114.76,125.22 115.06,125.52 116.16,125.52 R36.2 | IC3.41 117.27,101.23 113.46,97.42 112.16,97.42 111.46,98.52 111.46,99.92 v114.96,103.42
  Top 0.406: v115.86,112.52 115.86,112.02 117.06,110.81 117.06,108.42 116.76,108.42 v116.06,107.72
  Top 0.508: R36.2 122.17,125.51 R35.1
  Bottom 0.305: 114.66,103.12 v114.96,103.42 117.06,105.22 117.06,107.22 v116.06,107.72 | v115.86,112.52 115.86,122.02 v114.76,123.12
BATSENSE3  (via drill 0.6)
  Top 0.305: v15.7,53.9 15.7,56 16,56.3 17.1,56.3 R48.2 | IC4.41 18.21,32.01 14.4,28.2 13.1,28.2 12.4,29.3 12.4,30.7 v15.9,34.2
  Top 0.406: v16.8,43.3 16.8,42.8 18,41.6 18,39.2 17.7,39.2 v17,38.5
  Top 0.508: R48.2 23.11,56.29 R47.1
  Bottom 0.305: 15.6,33.9 v15.9,34.2 18,36 18,38 v17,38.5 | v16.8,43.3 16.8,52.8 v15.7,53.9
BATSENSE4  (via drill 0.6)
  Top 0.305: v65.23,53.9 65.23,56 65.53,56.3 66.63,56.3 R60.2 | IC5.41 67.74,32.01 63.93,28.2 62.63,28.2 61.93,29.3 61.93,30.7 v65.43,34.2
  Top 0.406: v66.33,43.3 66.33,42.8 67.53,41.6 67.53,39.2 67.23,39.2 v66.53,38.5
  Top 0.508: R60.2 72.64,56.29 R59.1
  Bottom 0.305: 65.13,33.9 v65.43,34.2 67.53,36 67.53,38 v66.53,38.5 | v66.33,43.3 66.33,52.8 v65.23,53.9
BATSENSE5  (via drill 0.6)
  Top 0.305: v114.76,53.9 114.76,56 115.06,56.3 116.16,56.3 R72.2 | IC6.41 117.27,32.01 113.46,28.2 112.16,28.2 111.46,29.3 111.46,30.7 v114.96,34.2
  Top 0.406: v115.86,43.3 115.86,42.8 117.06,41.6 117.06,39.2 116.76,39.2 v116.06,38.5
  Top 0.508: R72.2 122.17,56.29 R71.1
  Bottom 0.305: 114.66,33.9 v114.96,34.2 117.06,36 117.06,38 v116.06,38.5 | v115.86,43.3 115.86,52.8 v114.76,53.9
BB_IN  (via drill 0.6)
  Top 0.305: IC1.40 18.21,102.03 14.5,98.31 v13.8,98.31 | v8.8,97.31 8.2,97.31 7.8,97.72 7.8,112.42 v9.8,113.72 | v23.7,117.62 23.5,117.31 23,116.72 v15.3,116.72
  Bottom 0.305: v13.8,98.31 9.8,98.31 v8.8,97.31 | v9.8,113.72 14.4,113.72 15.3,114.42 v15.3,116.72 | JP1.7 27.77,117.59 v23.7,117.62
BB_IN1  (via drill 0.6)
  Top 0.305: IC2.40 67.74,102.03 64.03,98.31 v63.33,98.31 | v58.33,97.31 57.73,97.31 57.33,97.72 57.33,112.42 v59.33,113.72 | v73.23,117.62 73.03,117.31 72.53,116.72 v64.83,116.72
  Bottom 0.305: v63.33,98.31 59.33,98.31 v58.33,97.31 | v59.33,113.72 63.93,113.72 64.83,114.42 v64.83,116.72 | JP2.7 77.3,117.59 v73.23,117.62
BB_IN2  (via drill 0.6)
  Top 0.305: IC3.40 117.27,102.03 113.56,98.31 v112.86,98.31 | v107.86,97.31 107.26,97.31 106.86,97.72 106.86,112.42 v108.86,113.72 | v122.76,117.62 122.56,117.31 122.06,116.72 v114.36,116.72
  Bottom 0.305: v112.86,98.31 108.86,98.31 v107.86,97.31 | v108.86,113.72 113.46,113.72 114.36,114.42 v114.36,116.72 | JP5.7 126.83,117.59 v122.76,117.62
BB_IN3  (via drill 0.6)
  Top 0.305: IC4.40 18.21,32.81 14.5,29.1 v13.8,29.1 | v8.8,28.1 8.2,28.1 7.8,28.5 7.8,43.2 v9.8,44.5 | v23.7,48.4 23.5,48.1 23,47.5 v15.3,47.5
  Bottom 0.305: v13.8,29.1 9.8,29.1 v8.8,28.1 | v9.8,44.5 14.4,44.5 15.3,45.2 v15.3,47.5 | JP7.7 27.77,48.37 v23.7,48.4
BB_IN4  (via drill 0.6)
  Top 0.305: IC5.40 67.74,32.81 64.03,29.1 v63.33,29.1 | v58.33,28.1 57.73,28.1 57.33,28.5 57.33,43.2 v59.33,44.5 | v73.23,48.4 73.03,48.1 72.53,47.5 v64.83,47.5
  Bottom 0.305: v63.33,29.1 59.33,29.1 v58.33,28.1 | v59.33,44.5 63.93,44.5 64.83,45.2 v64.83,47.5 | JP9.7 77.3,48.37 v73.23,48.4
BB_IN5  (via drill 0.6)
  Top 0.305: IC6.40 117.27,32.81 113.56,29.1 v112.86,29.1 | v107.86,28.1 107.26,28.1 106.86,28.5 106.86,43.2 v108.86,44.5 | v122.76,48.4 122.56,48.1 122.06,47.5 v114.36,47.5
  Bottom 0.305: v112.86,29.1 108.86,29.1 v107.86,28.1 | v108.86,44.5 113.46,44.5 114.36,45.2 v114.36,47.5 | JP11.7 126.83,48.37 v122.76,48.4
BB_OUT  (via drill 0.6)
  Top 0.305: IC1.4 23.29,103.03 v23,103.31
  Bottom 0.305: v23,103.31 23,103.81 24.4,105.81 24.4,114.81 27.75,114.81 JP1.9
BB_OUT1  (via drill 0.6)
  Top 0.305: IC2.4 72.82,103.03 v72.53,103.31
  Bottom 0.305: v72.53,103.31 72.53,103.81 73.93,105.81 73.93,114.81 77.28,114.81 JP2.9
BB_OUT2  (via drill 0.6)
  Top 0.305: IC3.4 122.35,103.03 v122.06,103.31
  Bottom 0.305: v122.06,103.31 122.06,103.81 123.46,105.81 123.46,114.81 126.81,114.81 JP5.9
BB_OUT3  (via drill 0.6)
  Top 0.305: IC4.4 23.29,33.81 v23,34.1
  Bottom 0.305: v23,34.1 23,34.6 24.4,36.6 24.4,45.6 27.75,45.6 JP7.9
BB_OUT4  (via drill 0.6)
  Top 0.305: IC5.4 72.82,33.81 v72.53,34.1
  Bottom 0.305: v72.53,34.1 72.53,34.6 73.93,36.6 73.93,45.6 77.28,45.6 JP9.9
BB_OUT5  (via drill 0.6)
  Top 0.305: IC6.4 122.35,33.81 v122.06,34.1
  Bottom 0.305: v122.06,34.1 122.06,34.6 123.46,36.6 123.46,45.6 126.81,45.6 JP11.9
BID0
  Top 0.305: IC1.28 24.9,108.64 24.9,110.02 20.8,115.62 15.2,115.62 13.3,113.81 12.6,113.12 11.9,113.12 11.9,112.06 U$1.1
BID1
  Top 0.305: 24.3,108.84 IC1.29 24.1,108.64 24.1,110.02 20.4,114.92 15.4,114.92 13.9,113.42 13.9,109.42 13.8,109.31 11.9,109.31 U$1.2
BID2
  Top 0.305: IC1.32 21.69,111.63 20.1,114.42 15.6,114.42 14.5,113.22 14.5,108.92 13.4,107.81 12,107.81 11.9,107.72 11.9,106.98 U$1.3
BID3
  Top 0.305: IC1.33 20.9,108.64 20.9,111.52 19.7,113.81 16,113.81 15.2,112.92 15.2,108.81 13.6,107.22 13.6,104.62 13.3,104.31 11.82,104.31 U$1.4
BID4
  Top 0.305: IC2.28 74.43,108.64 74.43,110.02 70.33,115.62 64.73,115.62 62.83,113.81 62.13,113.12 61.43,113.12 61.43,112.06 U$2.1
BID5
  Top 0.305: IC2.32 71.22,111.63 69.63,114.42 65.13,114.42 64.03,113.22 64.03,108.92 62.93,107.81 61.53,107.81 61.43,107.72 61.43,106.98 U$2.3
BID6
  Top 0.305: 73.83,108.84 IC2.29 73.63,108.64 73.63,110.02 69.93,114.92 64.93,114.92 63.43,113.42 63.43,109.42 63.33,109.31 61.43,109.31 U$2.2
BID7
  Top 0.305: IC2.33 70.43,108.64 70.43,111.52 69.23,113.81 65.53,113.81 64.73,112.92 64.73,108.81 63.13,107.22 63.13,104.62 62.83,104.31 61.35,104.31 U$2.4
BID8
  Top 0.305: IC3.28 123.96,108.64 123.96,110.02 119.86,115.62 114.26,115.62 112.36,113.81 111.66,113.12 110.96,113.12 110.96,112.06 U$3.1
BID9
  Top 0.305: IC3.32 120.75,111.63 119.16,114.42 114.66,114.42 113.56,113.22 113.56,108.92 112.46,107.81 111.06,107.81 110.96,107.72 110.96,106.98 U$3.3
BID10
  Top 0.305: 123.36,108.84 IC3.29 123.16,108.64 123.16,110.02 119.46,114.92 114.46,114.92 112.96,113.42 112.96,109.42 112.86,109.31 110.96,109.31 U$3.2
BID11
  Top 0.305: IC3.33 119.96,108.64 119.96,111.52 118.76,113.81 115.06,113.81 114.26,112.92 114.26,108.81 112.66,107.22 112.66,104.62 112.36,104.31 110.88,104.31 U$3.4
BID12
  Top 0.305: IC4.28 24.9,40.8 20.8,46.4 15.2,46.4 13.3,44.6 12.6,43.9 11.9,43.9 11.9,42.84 U$4.1
BID13
  Top 0.305: IC4.32 21.69,42.41 20.1,45.2 15.6,45.2 14.5,44 14.5,39.7 13.4,38.6 12,38.6 11.9,38.5 11.9,37.76 U$4.3
BID14
  Top 0.305: 24.3,39.63 IC4.29 24.1,40.8 20.4,45.7 15.4,45.7 13.9,44.2 13.9,40.2 13.8,40.1 11.9,40.1 U$4.2
BID15
  Top 0.305: IC4.33 20.9,42.3 19.7,44.6 16,44.6 15.2,43.7 15.2,39.6 13.6,38 13.6,35.4 13.3,35.1 11.82,35.1 U$4.4
BID16
  Top 0.305: IC5.28 74.43,40.8 70.33,46.4 64.73,46.4 62.83,44.6 62.13,43.9 61.43,43.9 61.43,42.84 U$5.1
BID17
  Top 0.305: IC5.32 71.22,42.41 69.63,45.2 65.13,45.2 64.03,44 64.03,39.7 62.93,38.6 61.53,38.6 61.43,38.5 61.43,37.76 U$5.3
BID18
  Top 0.305: 73.83,39.63 IC5.29 73.63,40.8 69.93,45.7 64.93,45.7 63.43,44.2 63.43,40.2 63.33,40.1 61.43,40.1 U$5.2
BID19
  Top 0.305: IC5.33 70.43,42.3 69.23,44.6 65.53,44.6 64.73,43.7 64.73,39.6 63.13,38 63.13,35.4 62.83,35.1 61.35,35.1 U$5.4
BID20
  Top 0.305: IC6.28 123.96,40.8 119.86,46.4 114.26,46.4 112.36,44.6 111.66,43.9 110.96,43.9 110.96,42.84 U$6.1
BID21
  Top 0.305: IC6.32 120.75,42.41 119.16,45.2 114.66,45.2 113.56,44 113.56,39.7 112.46,38.6 111.06,38.6 110.96,38.5 110.96,37.76 U$6.3
BID22
  Top 0.305: 123.36,39.63 IC6.29 123.16,40.8 119.46,45.7 114.46,45.7 112.96,44.2 112.96,40.2 112.86,40.1 110.96,40.1 U$6.2
BID23
  Top 0.305: IC6.33 119.96,42.3 118.76,44.6 115.06,44.6 114.26,43.7 114.26,39.6 112.66,38 112.66,35.4 112.36,35.1 110.88,35.1 U$6.4
CHARGE  (via drill 0.6)
  Top 0.305: IC1.7 25.69,100.6 v25.7,100.92
  Bottom 0.305: v25.7,100.92 27.78,100.92 JP1.19
CHARGE1  (via drill 0.6)
  Top 0.305: IC2.7 75.22,100.6 v75.23,100.92
  Bottom 0.305: v75.23,100.92 77.31,100.92 JP2.19
CHARGE2  (via drill 0.6)
  Top 0.305: IC3.7 124.75,100.6 v124.76,100.92
  Bottom 0.305: v124.76,100.92 126.84,100.92 JP5.19
CHARGE3  (via drill 0.6)
  Top 0.305: IC4.7 25.69,31.39 v25.7,31.7
  Bottom 0.305: v25.7,31.7 27.78,31.7 JP7.19
CHARGE4  (via drill 0.6)
  Top 0.305: IC5.7 75.22,31.39 v75.23,31.7
  Bottom 0.305: v75.23,31.7 77.31,31.7 JP9.19
CHARGE5  (via drill 0.6)
  Top 0.305: IC6.7 124.75,31.39 v124.76,31.7
  Bottom 0.305: v124.76,31.7 126.84,31.7 JP11.19
CHARGE_DONE  (via drill 0.6)
  Top 0.305: IC1.5 24.09,102.3 v24.1,102.31
  Bottom 0.305: v24.1,102.31 25.4,103.62 27.8,103.62 27.8,104.67 JP1.17
CHARGE_DONE1  (via drill 0.6)
  Top 0.305: IC2.5 73.62,102.3 v73.63,102.31
  Bottom 0.305: v73.63,102.31 74.93,103.62 77.33,103.62 77.33,104.67 JP2.17
CHARGE_DONE2  (via drill 0.6)
  Top 0.305: IC3.5 123.15,102.3 v123.16,102.31
  Bottom 0.305: v123.16,102.31 124.46,103.62 126.86,103.62 126.86,104.67 JP5.17
CHARGE_DONE3  (via drill 0.6)
  Top 0.305: IC4.5 24.09,33.09 v24.1,33.1
  Bottom 0.305: v24.1,33.1 25.4,34.4 27.8,34.4 27.8,35.46 JP7.17
CHARGE_DONE4  (via drill 0.6)
  Top 0.305: IC5.5 73.62,33.09 v73.63,33.1
  Bottom 0.305: v73.63,33.1 74.93,34.4 77.33,34.4 77.33,35.46 JP9.17
CHARGE_DONE5  (via drill 0.6)
  Top 0.305: IC6.5 123.15,33.09 v123.16,33.1
  Bottom 0.305: v123.16,33.1 124.46,34.4 126.86,34.4 126.86,35.46 JP11.17
CHIP_ENABLE  (via drill 0.6)
  Top 0.305: IC1.13 31.79,99.63 v32.7,98.72 | v34.1,109.31 31,109.31 v30.6,109.72
  Bottom 0.305: v32.7,98.72 33.2,98.72 33.9,99.42 33.9,108.92 v34.1,109.31 | v30.6,109.72 27.83,109.72 JP1.13
CHIP_ENABLE1  (via drill 0.6)
  Top 0.305: IC2.13 81.32,99.63 v82.23,98.72 | v83.63,109.31 80.53,109.31 v80.13,109.72
  Bottom 0.305: v82.23,98.72 82.73,98.72 83.43,99.42 83.43,108.92 v83.63,109.31 | v80.13,109.72 77.36,109.72 JP2.13
CHIP_ENABLE2  (via drill 0.6)
  Top 0.305: IC3.13 130.85,99.63 v131.76,98.72 | v133.16,109.31 130.06,109.31 v129.66,109.72
  Bottom 0.305: v131.76,98.72 132.26,98.72 132.96,99.42 132.96,108.92 v133.16,109.31 | v129.66,109.72 126.89,109.72 JP5.13
CHIP_ENABLE3  (via drill 0.6)
  Top 0.305: IC4.13 31.79,30.41 v32.7,29.5 | v34.1,40.1 31,40.1 v30.6,40.5
  Bottom 0.305: v32.7,29.5 33.2,29.5 33.9,30.2 33.9,39.7 v34.1,40.1 | v30.6,40.5 27.83,40.5 JP7.13
CHIP_ENABLE4  (via drill 0.6)
  Top 0.305: IC5.13 81.32,30.41 v82.23,29.5 | v83.63,40.1 80.53,40.1 v80.13,40.5
  Bottom 0.305: v82.23,29.5 82.73,29.5 83.43,30.2 83.43,39.7 v83.63,40.1 | v80.13,40.5 77.36,40.5 JP9.13
CHIP_ENABLE5  (via drill 0.6)
  Top 0.305: IC6.13 130.85,30.41 v131.76,29.5 | v133.16,40.1 130.06,40.1 v129.66,40.5
  Bottom 0.305: v131.76,29.5 132.26,29.5 132.96,30.2 132.96,39.7 v133.16,40.1 | v129.66,40.5 126.89,40.5 JP11.13
CTS  (via drill 0.6)
  Top 0.305: IC1.24 28.09,111.4 v33.4,116.42 | v33.4,120.81 33.4,128.01 29.2,131.81 13.4,131.81 XBEE.12
  Bottom 0.305: v33.4,116.42 v33.4,120.81
CTS1  (via drill 0.6)
  Top 0.305: IC2.24 77.62,111.4 v82.93,116.42 | v82.93,120.81 82.93,128.01 78.73,131.81 62.93,131.81 XBEE1.12
  Bottom 0.305: v82.93,116.42 v82.93,120.81
CTS2  (via drill 0.6)
  Top 0.305: IC3.24 127.15,111.4 v132.46,116.42 | v132.46,120.81 132.46,128.01 128.26,131.81 112.46,131.81 XBEE2.12
  Bottom 0.305: v132.46,116.42 v132.46,120.81
CTS3  (via drill 0.6)
  Top 0.305: IC4.24 28.09,42.19 v33.4,47.2 | v33.4,51.6 33.4,58.8 29.2,62.6 13.4,62.6 XBEE3.12
  Bottom 0.305: v33.4,47.2 v33.4,51.6
CTS4  (via drill 0.6)
  Top 0.305: IC5.24 77.62,42.19 v82.93,47.2 | v82.93,51.6 82.93,58.8 78.73,62.6 62.93,62.6 XBEE4.12
  Bottom 0.305: v82.93,47.2 v82.93,51.6
CTS5  (via drill 0.6)
  Top 0.305: IC6.24 127.15,42.19 v132.46,47.2 | v132.46,51.6 132.46,58.8 128.26,62.6 112.46,62.6 XBEE5.12
  Bottom 0.305: v132.46,47.2 v132.46,51.6
DISCHARGE  (via drill 0.6)
  Top 0.305: IC1.6 24.89,102.93 v21,105.92
  Bottom 0.305: v21,105.92 20.9,106.02 20.9,106.97 JP1.16
DISCHARGE1  (via drill 0.6)
  Top 0.305: IC2.6 74.42,102.93 v70.53,105.92
  Bottom 0.305: v70.53,105.92 70.43,106.02 70.43,106.97 JP2.16
DISCHARGE2  (via drill 0.6)
  Top 0.305: IC3.6 123.95,102.93 v120.06,105.92
  Bottom 0.305: v120.06,105.92 119.96,106.02 119.96,106.97 JP5.16
DISCHARGE3  (via drill 0.6)
  Top 0.305: IC4.6 24.89,33.71 v21,36.7
  Bottom 0.305: v21,36.7 20.9,36.8 20.9,37.76 JP7.16
DISCHARGE4  (via drill 0.6)
  Top 0.305: IC5.6 74.42,33.71 v70.53,36.7
  Bottom 0.305: v70.53,36.7 70.43,36.8 70.43,37.76 JP9.16
DISCHARGE5  (via drill 0.6)
  Top 0.305: IC6.6 123.95,33.71 v120.06,36.7
  Bottom 0.305: v120.06,36.7 119.96,36.8 119.96,37.76 JP11.16
DIVCAP  (via drill 0.6)
  Top 0.305: IC1.42 19,100.52 18.3,100.52 14.6,96.81 12.7,96.81 11.3,98.22 11.3,101.31 11.9,102.31 12.7,102.31 14.6,104.22 14.6,107.42 16.3,109.02 v16.8,109.52
  Bottom 0.305: JP1.14 17.85,109.77 v16.8,109.52
DIVCAP1  (via drill 0.6)
  Top 0.305: IC2.42 68.53,100.52 67.83,100.52 64.13,96.81 62.23,96.81 60.83,98.22 60.83,101.31 61.43,102.31 62.23,102.31 64.13,104.22 64.13,107.42 65.83,109.02 v66.33,109.52
  Bottom 0.305: JP2.14 67.38,109.77 v66.33,109.52
DIVCAP2  (via drill 0.6)
  Top 0.305: IC3.42 118.06,100.52 117.36,100.52 113.66,96.81 111.76,96.81 110.36,98.22 110.36,101.31 110.96,102.31 111.76,102.31 113.66,104.22 113.66,107.42 115.36,109.02 v115.86,109.52
  Bottom 0.305: JP5.14 116.91,109.77 v115.86,109.52
DIVCAP3  (via drill 0.6)
  Top 0.305: IC4.42 19,31.3 18.3,31.3 14.6,27.6 12.7,27.6 11.3,29 11.3,32.1 11.9,33.1 12.7,33.1 14.6,35 14.6,38.2 16.3,39.8 v16.8,40.3
  Bottom 0.305: JP7.14 17.85,40.55 v16.8,40.3
DIVCAP4  (via drill 0.6)
  Top 0.305: IC5.42 68.53,31.3 67.83,31.3 64.13,27.6 62.23,27.6 60.83,29 60.83,32.1 61.43,33.1 62.23,33.1 64.13,35 64.13,38.2 65.83,39.8 v66.33,40.3
  Bottom 0.305: JP9.14 67.38,40.55 v66.33,40.3
DIVCAP5  (via drill 0.6)
  Top 0.305: IC6.42 118.06,31.3 117.36,31.3 113.66,27.6 111.76,27.6 110.36,29 110.36,32.1 110.96,33.1 111.76,33.1 113.66,35 113.66,38.2 115.36,39.8 v115.86,40.3
  Bottom 0.305: JP11.14 116.91,40.55 v115.86,40.3
DRIB  (via drill 0.6)
  Top 0.305: IC1.43 20.31,99.63 21.3,100.62 v21.3,103.42
  Bottom 0.305: v21.3,103.42 21.3,104.52 21.4,104.62 20.72,104.62 JP1.18